# Altium PCB ESC.PcbDoc (part 1 of 3)
Units mm, origin at the board's own origin, x right, y up, seen from the top; angles counter-clockwise.
Board outline 60 x 40 mm, 4 copper layers (L1-SIGNAL/PWR, L2-GND, L3-PWR, L4-SIGNAL/PWR), stack 1.571 mm thick; 124 components, 80 nets, 417 pads, 463 vias.
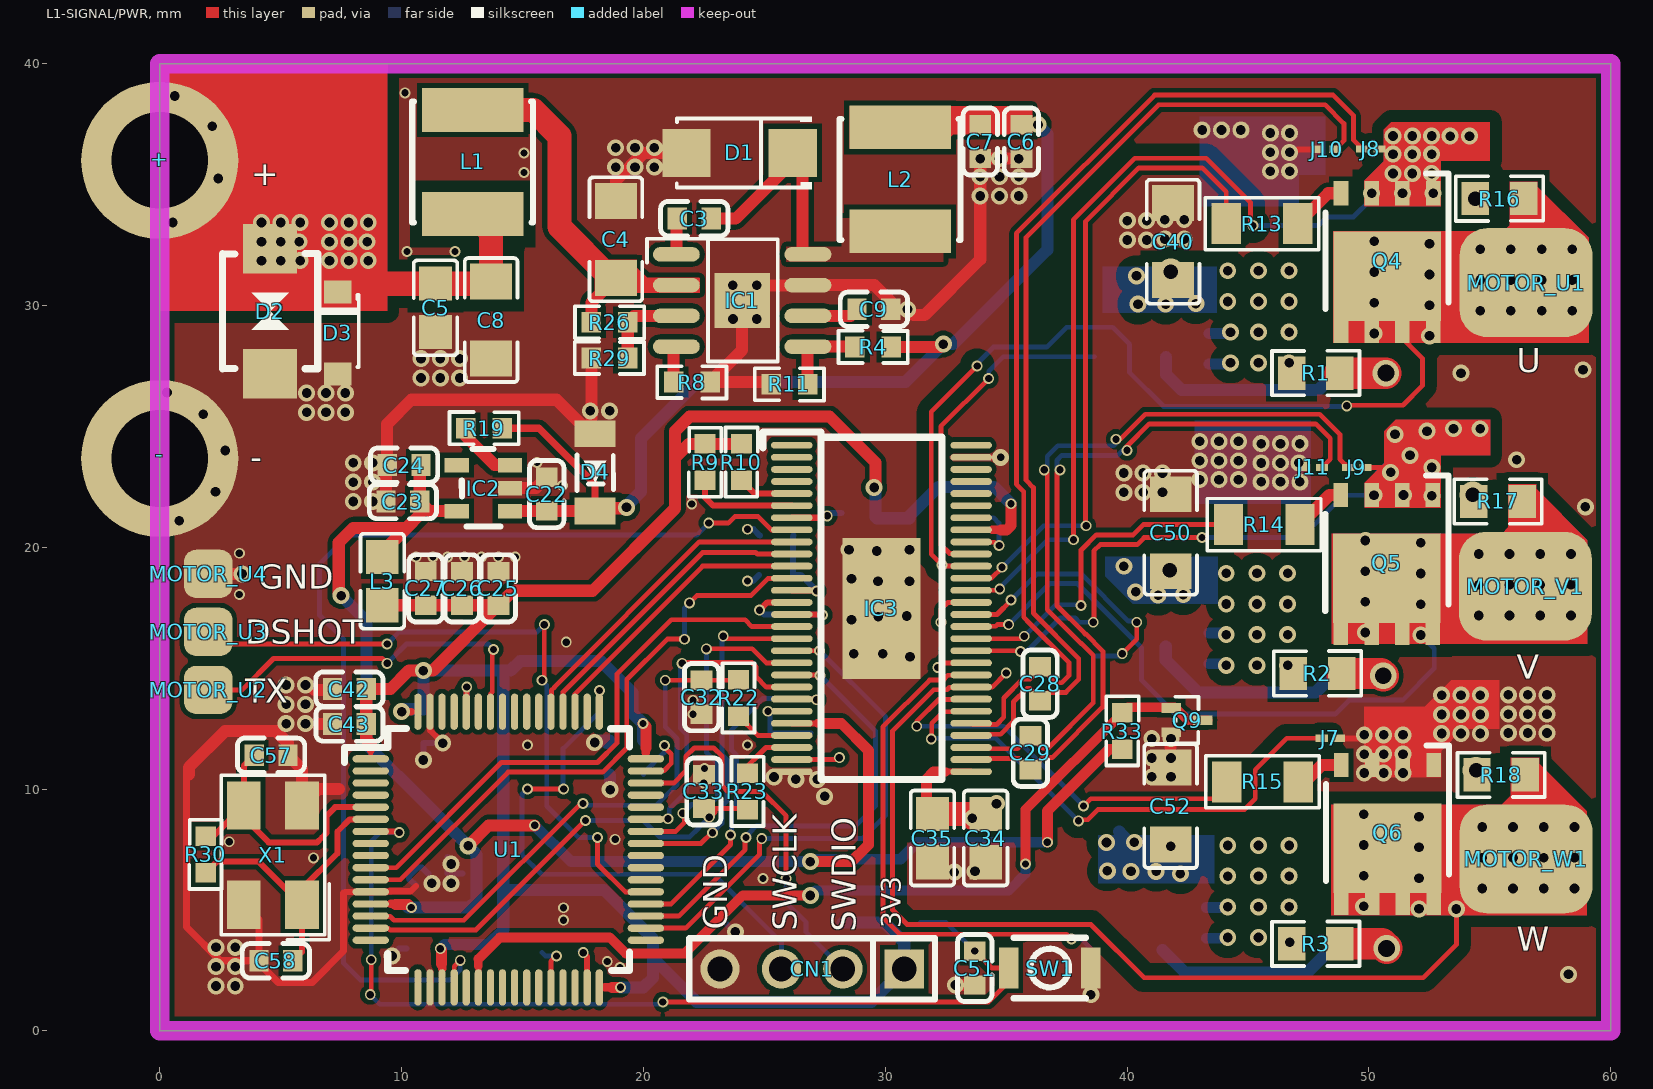
[diagram p0: L1-SIGNAL/PWR view]
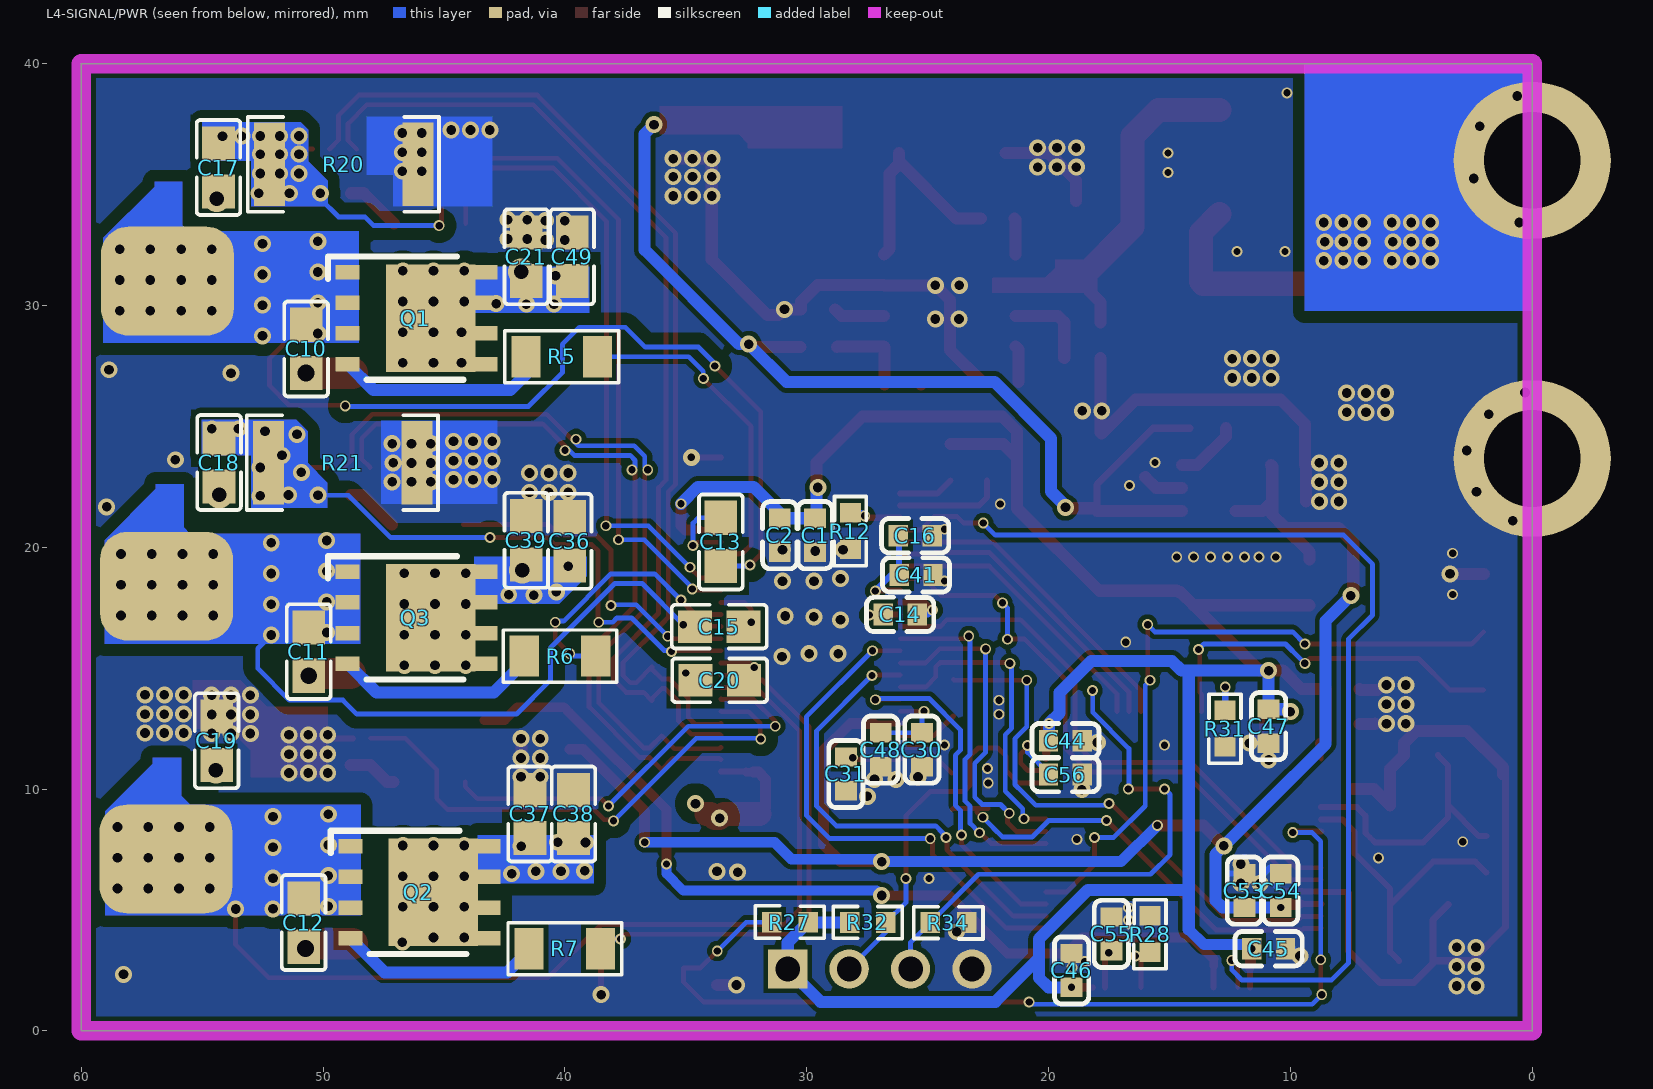
[diagram p1: L4-SIGNAL/PWR view, seen from below]
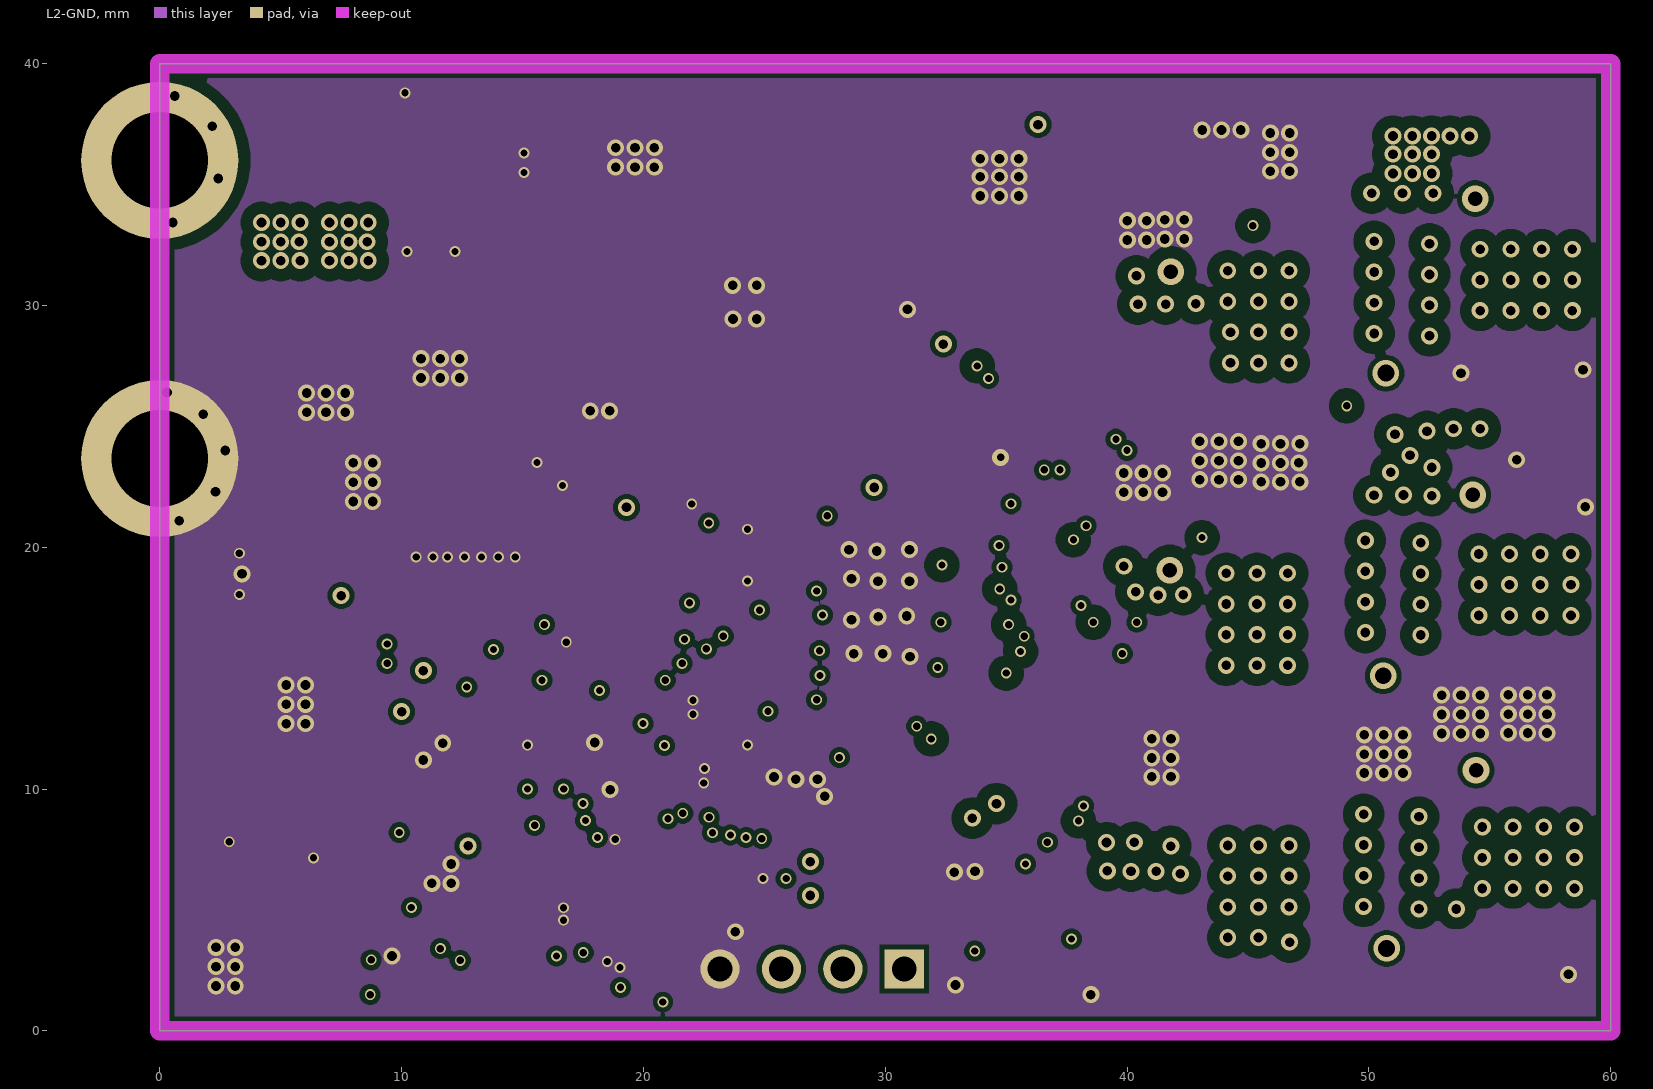
[diagram p2: L2-GND]
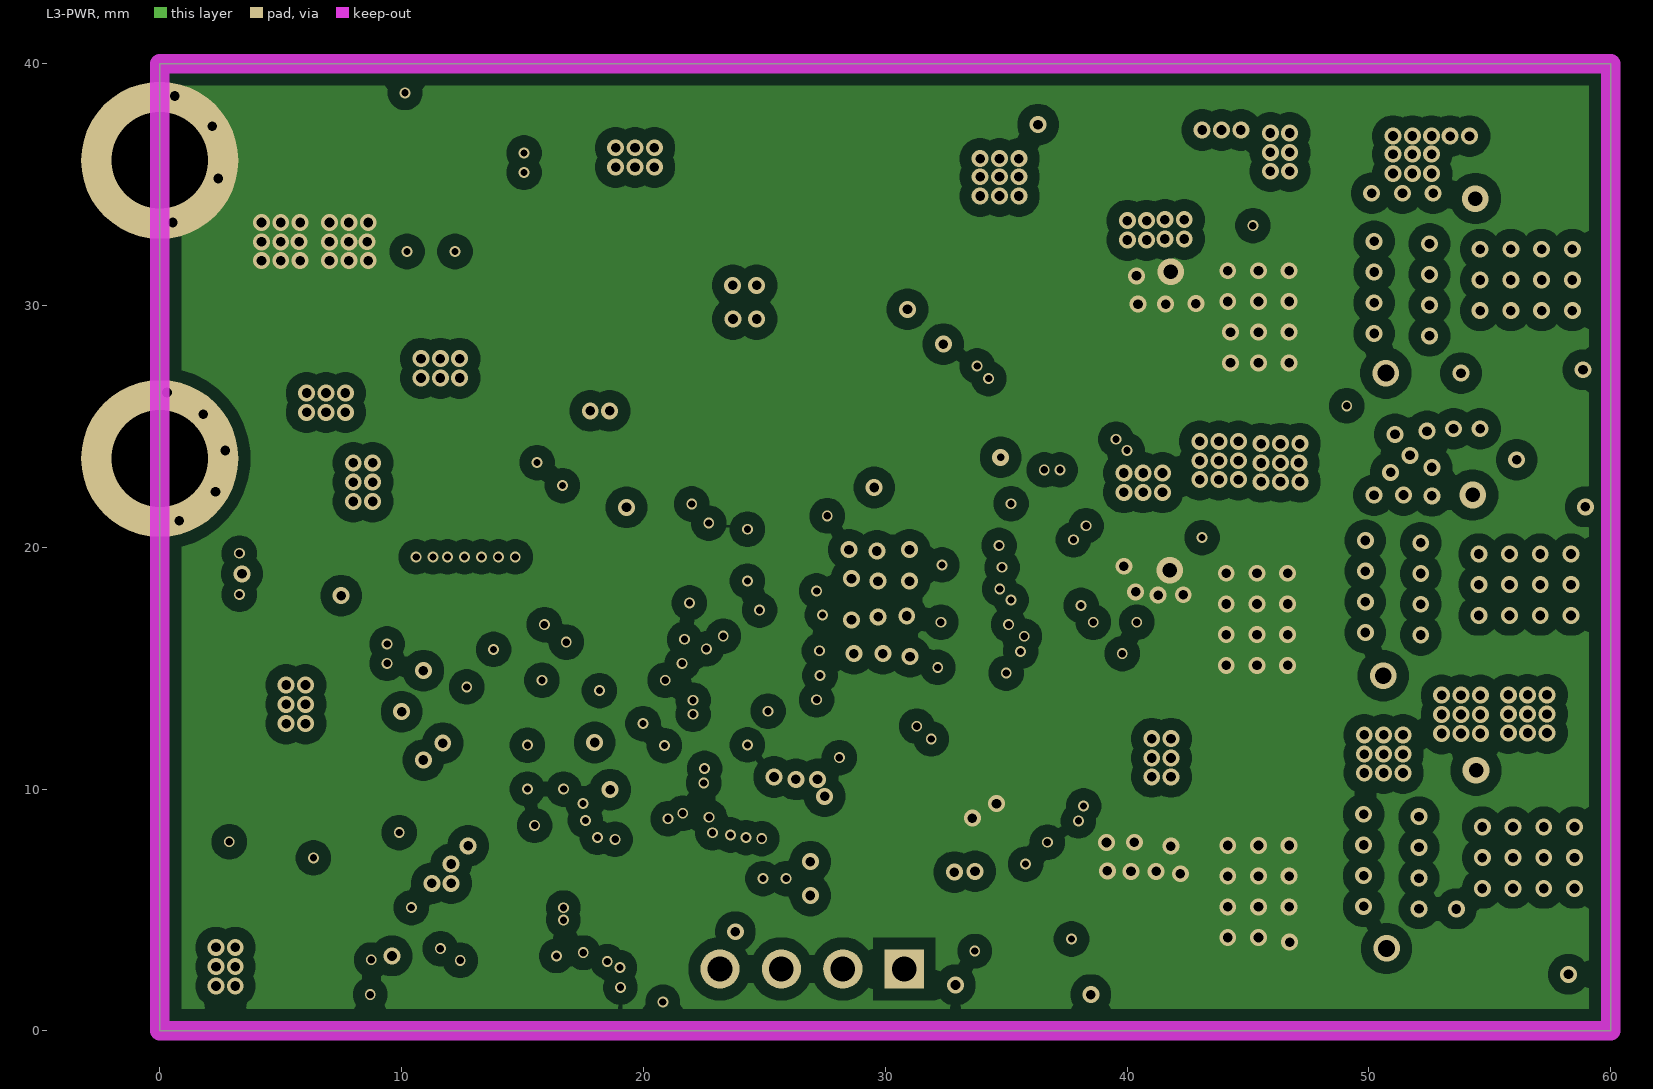
[diagram p3: L3-PWR]
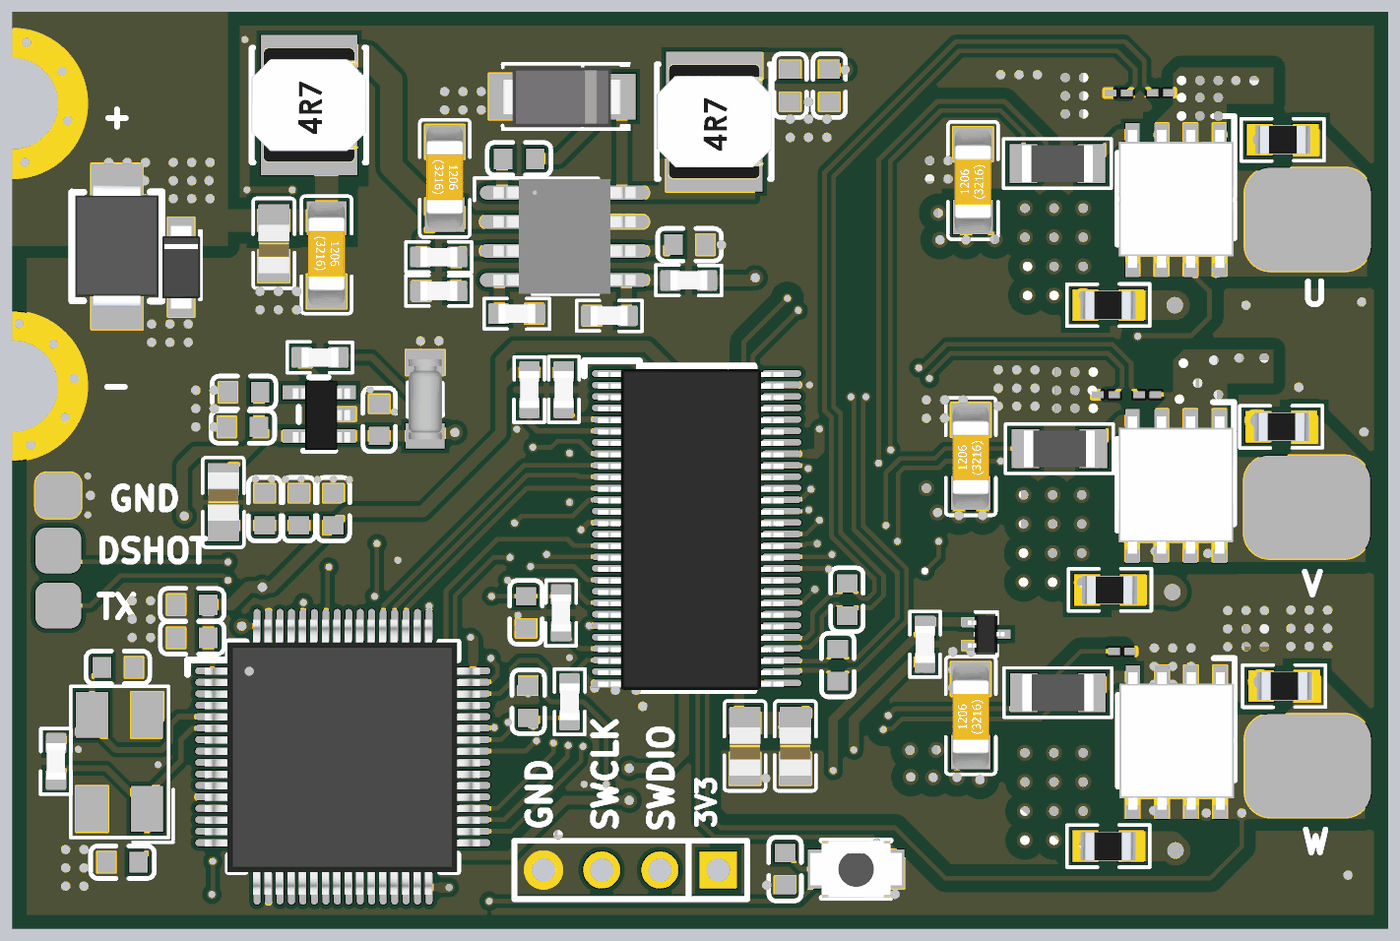
[diagram p5: 3D render of the assembled board from above, using the file's embedded part models]
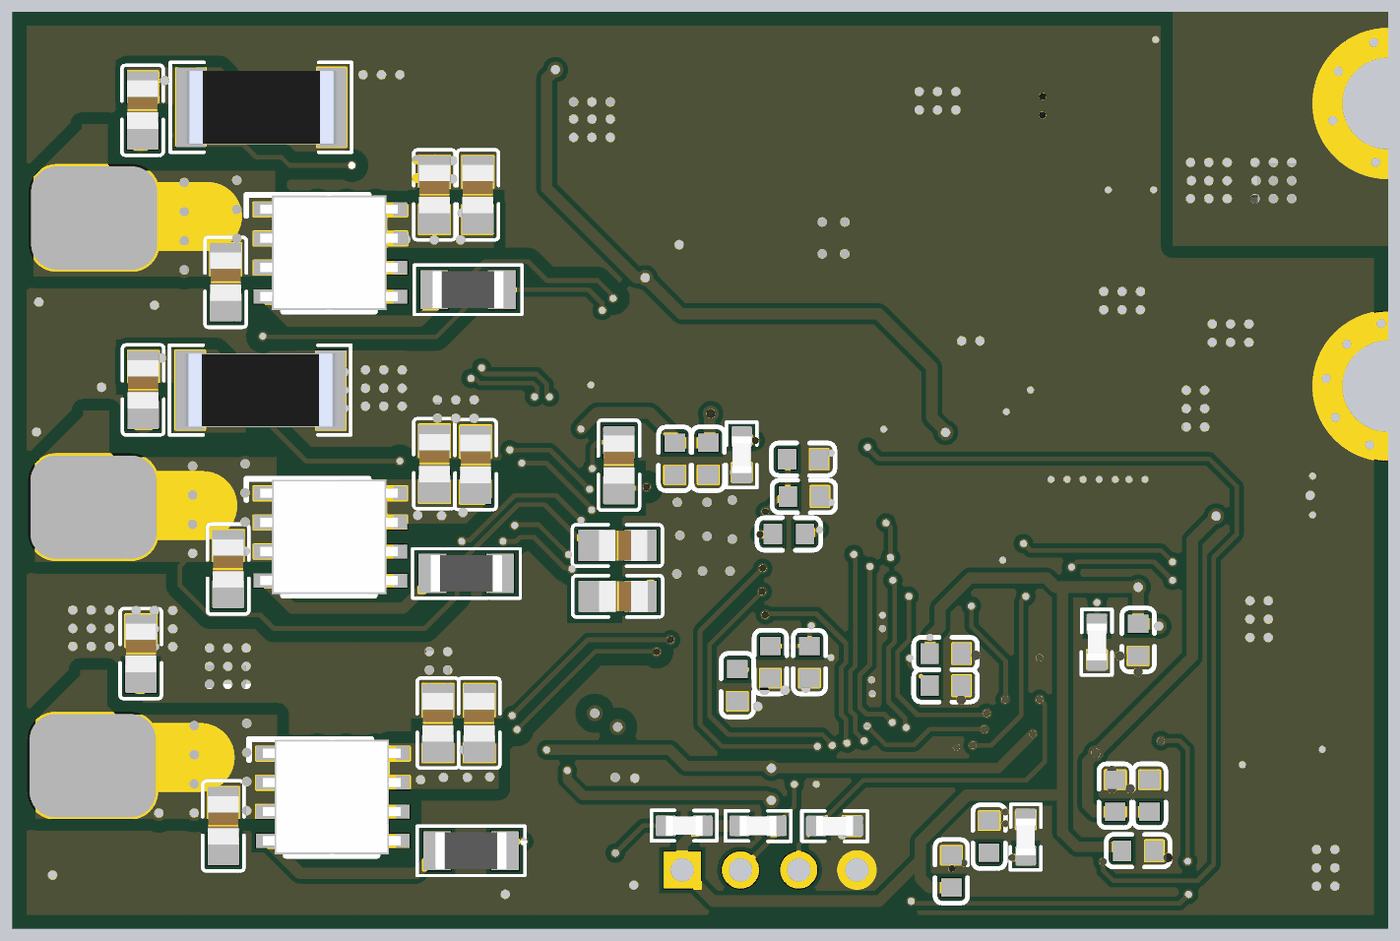
[diagram p6: 3D render of the assembled board from below, using the file's embedded part models]

## Layer stack, top to bottom
Top Solder: solder mask 0.0102, Solder Resist, Dk 3.5
L1-SIGNAL/PWR: signal copper 0.035
Dielectric 2: prepreg 0.107, 3313, Dk 4.5
Dielectric 4: prepreg 0.0935, 2116, Dk 4.1
L2-GND: signal copper 0.07
Dielectric 1: core 0.96, Core-042, Dk 4.6
L3-PWR: signal copper 0.07
Dielectric 3: prepreg 0.107, 3313, Dk 4.5
Dielectric 5: prepreg 0.0935, 2116, Dk 4.1
L4-SIGNAL/PWR: signal copper 0.035
Bottom Solder: solder mask 0.0102, Solder Resist, Dk 3.5

## Board outline
0,0 60,0 60,40 0,40

## Design rules (kind name [scope] priority, off if disabled: settings)
Clearance Clearance_POWER [InNetClass('POWER')] p1: gap=0.2 ignorepadtopadclearanceinfootprint=TRUE except(0.5: Arc-Fill Arc-Poly Arc-Region Track-Fill Track-Poly Track-Region SMDPad-Fill SMDPad-Poly SMDPad-Region THPad-Fill THPad-Poly THPad-Region Via-Fill Via-Poly Via-Region Fill-Fill Fill-Poly Fill-Region Poly-Poly Poly-Region Region-Region)
Clearance [All] p2: gap=0.2 ignorepadtopadclearanceinfootprint=TRUE
ComponentClearance Ignore_Top_Bottom_Collision [OnTop vs OnBottom] p1: gap=0.254 collisioncheckmode=3 verticalgap=-2 showdistances=FALSE
ComponentClearance [All] p2: gap=0.254 collisioncheckmode=3 verticalgap=0.254 showdistances=FALSE
DiffPairsRouting DiffPair_S2DiffPairsRouting [InDifferentialPair ('S2')] p1: maxlimit=0.4 minlimit=0.17 mostfreqgap=0.2 toplayer_minwidth=0.17 toplayer_maxwidth=0.2 toplayer_prefwidth=0.2 midlayer1_minwidth=0.17 midlayer1_maxwidth=0.2 midlayer1_prefwidth=0.2 midlayer2_minwidth=0.17 midlayer2_maxwidth=0.2 midlayer2_prefwidth=0.2 bottomlayer_minwidth=0.17 bottomlayer_maxwidth=0.2 bottomlayer_prefwidth=0.2 maxuncoupledlength=12.7
DiffPairsRouting DiffPair_S1DiffPairsRouting [InDifferentialPair ('S1')] p2: maxlimit=0.4 minlimit=0.17 mostfreqgap=0.2 toplayer_minwidth=0.17 toplayer_maxwidth=0.2 toplayer_prefwidth=0.2 midlayer1_minwidth=0.17 midlayer1_maxwidth=0.2 midlayer1_prefwidth=0.2 midlayer2_minwidth=0.17 midlayer2_maxwidth=0.2 midlayer2_prefwidth=0.2 bottomlayer_minwidth=0.17 bottomlayer_maxwidth=0.2 bottomlayer_prefwidth=0.2 maxuncoupledlength=12.7
DiffPairsRouting DiffPairsRouting_1 [InDifferentialPair ('S1')] p3: maxlimit=0.254 minlimit=0.254 mostfreqgap=0.254 toplayer_minwidth=0.381 toplayer_maxwidth=0.381 toplayer_prefwidth=0.381 midlayer1_minwidth=0.381 midlayer1_maxwidth=0.381 midlayer1_prefwidth=0.381 midlayer2_minwidth=0.381 midlayer2_maxwidth=0.381 midlayer2_prefwidth=0.381 bottomlayer_minwidth=0.381 bottomlayer_maxwidth=0.381 bottomlayer_prefwidth=0.381 maxuncoupledlength=12.7
DiffPairsRouting DiffPair_DIFFDiffPairsRouting [InDifferentialPair ('CAN')] p4: maxlimit=0.4 minlimit=0.3 mostfreqgap=0.3 toplayer_minwidth=0.2 toplayer_maxwidth=0.4 toplayer_prefwidth=0.2 midlayer1_minwidth=0.2 midlayer1_maxwidth=0.4 midlayer1_prefwidth=0.2 midlayer2_minwidth=0.2 midlayer2_maxwidth=0.4 midlayer2_prefwidth=0.2 bottomlayer_minwidth=0.2 bottomlayer_maxwidth=0.4 bottomlayer_prefwidth=0.2 maxuncoupledlength=12.7
DiffPairsRouting [All] p5: maxlimit=0.254 minlimit=0.254 mostfreqgap=0.254 toplayer_minwidth=0.381 toplayer_maxwidth=0.381 toplayer_prefwidth=0.381 midlayer1_minwidth=0.381 midlayer1_maxwidth=0.381 midlayer1_prefwidth=0.381 midlayer2_minwidth=0.381 midlayer2_maxwidth=0.381 midlayer2_prefwidth=0.381 bottomlayer_minwidth=0.381 bottomlayer_maxwidth=0.381 bottomlayer_prefwidth=0.381 maxuncoupledlength=12.7
HoleSize [All] p1: absolutevalues=TRUE maxlimit=5 minlimit=0.025 maxpercent=80.000 minpercent=20.000
HoleToHoleClearance [All] p1: gap=0.2 allowstackedmicrovias=TRUE
MatchedLengths DiffPair_S2MatchedLengths [InDifferentialPair ('S2')] p1: tolerance=10 checknetsindiffpair=TRUE checkdiffpairvsdiffpair=FALSE checkxsignals=FALSE checkothers=FALSE
MatchedLengths DiffPair_S1MatchedLengths [InDifferentialPair ('S1')] p2: tolerance=10 checknetsindiffpair=TRUE checkdiffpairvsdiffpair=FALSE checkxsignals=FALSE checkothers=FALSE
MatchedLengths [InDifferentialPair ('S1')] p3: tolerance=25.4 checknetsindiffpair=FALSE checkdiffpairvsdiffpair=TRUE checkxsignals=TRUE checkothers=TRUE
MatchedLengths DiffPair_DIFFMatchedLengths [InDifferentialPair ('CAN')] p4: tolerance=5 checknetsindiffpair=TRUE checkdiffpairvsdiffpair=FALSE checkxsignals=FALSE checkothers=FALSE
MinimumSolderMaskSliver [All] p1: minsoldermaskwidth=0.1
PlaneConnect [All] p1: pad.planeconnectstyle=Relief pad.reliefexpansion=1 pad.reliefentries=4 pad.reliefconductorwidth=1 pad.reliefairgap=1 via.planeconnectstyle=Direct via.reliefexpansion=1 via.reliefentries=4 via.reliefconductorwidth=1 via.reliefairgap=1
PolygonConnect [All] p1: connectstyle=Direct reliefconductorwidth=0.254 reliefentries=4 polygonreliefangle="90 Angle" airgapwidth=0.254
RoutingVias [All] p1: holewidth=0.4 width=0.7 viastyle="Through Hole" minholewidth=0.2 minwidth=0.4 maxholewidth=0.7 maxwidth=1.1
SilkToSilkClearance [All] p1: silktosilkclearance=0
SilkToSolderMaskClearance [IsPad] p1: minsilkscreentomaskgap=0.1 clearancetoexposedcopper=TRUE
SolderMaskExpansion [All] p1: expansion=0.102 istentingtop=FALSE
SupplyNets "Schematic Supply Nets" [InNet('GND')] p1: voltage=0.000
SupplyNets "Schematic Supply Nets_6" [InNet('V_5V')] p2: voltage=0.000
SupplyNets "Schematic Supply Nets_5" [InNet('VDD_SPI')] p3: voltage=0.000
SupplyNets "Schematic Supply Nets_4" [InNet('POWER_BUCK')] p4: voltage=0.000
SupplyNets "Schematic Supply Nets_3" [InNet('POWER_IN')] p5: voltage=0.000
SupplyNets "Schematic Supply Nets_1" [InNet('A3V3')] p6: voltage=0.000
UnRoutedNet [All] p1: checkbadconnections=TRUE
Width Width_ [All] p1: maxlimit=14 minlimit=0.17 preferedwidth=0.254
Width Width_power [InNetClass('PWR')] p2: maxlimit=14 minlimit=0.2 preferedwidth=5
Width Width_signal [All] p3: maxlimit=1.5 minlimit=0.17 preferedwidth=0.3 midlayer2_maxwidth=0.5 minimp=50.000000 maximp=50.000000 favimp=50.000000
21 further rules are at their usual default settings.

## Classes and differential pairs
net class POWER: POWER_IN SH_A SH_B SH_C SL_A SL_B SL_C
net class PWR: A3V3 GND POWER_BUCK V_5V VDD_SPI
differential pair class DIFF: CAN S1 S2
net class TIME1: AH AL BH BL CH CL EN_GATE
net class SPI3: GND NetIC3_7 nSCS SCLK SDI SDO
net class CSAI: S1_N S1_P S2_N S2_P
differential pair S2: +S2_P -S2_N
differential pair S1: +S1_P -S1_N

## Components (designator, comment, footprint, x,y, rotation, side; value= is the part's Value field where it differs from the comment)
+ "PAD" PAD#1 5,32.8 r0 top (schematic designator J1)
- "PAD" PAD#2 4.78,23.67 r0 top (schematic designator J2)
C1 "100nF" C0603 29.653,20.5 r90 bottom
C2 "10uF" C0603 31.112,20.499 r90 bottom
C3 "100nF" C0603 22.1,33.59 r180 top
C4 "10uF" C1206 18.86,32.731 r90 top
C5 "100nF" C0805#1 11.4,29.9 r90 top
C6 "47uF" C0603 35.627,36.777 r90 top
C7 "47uF" C0603 33.927,36.777 r90 top
C8 "10uF" C1206 13.7,29.395 r90 top
C9 "15nF" C0603 29.53,29.84 r180 top
C10 "470PF" C0805#2 50.7,28.2 r270 bottom
C11 "470PF" C0805#2 50.591,15.685 r270 bottom
C12 "470PF" C0805#2 50.8,4.48 r270 bottom
C13 "100nF" C0805#2 33.549,20.22 r270 bottom
C14 "220nF" C0603 26.134,17.22 r180 bottom
C15 "100nF" C0805#2 33.614,16.72 r0 bottom
C16 "2.2uF" C0603 25.513,20.48 r0 bottom
C17 "470PF" C0805#2 54.322,35.703 r270 bottom
C18 "470PF" C0805#2 54.3,23.504 r270 bottom
C19 "470PF" C0805#2 54.4,12 r270 bottom
C20 "100nF" C0805#2 33.6,14.5 r0 bottom
C21 "100nF" C0805#2 41.596,32.016 r270 bottom
C22 "10uF" C0603 16,22.2 r270 top
C23 "10uF" C0603 10.05,21.89 r0 top
C24 "100nF" C0603 10.1,23.4 r0 top
C25 "10uF" C0603 14,18.3 r270 top
C26 "1uF" C0603 12.5,18.3 r270 top
C27 "100nF" C0603 11,18.3 r270 top
C28 "1nF" C0603 36.4,14.355 r90 top
C29 "1nF" C0603 36,11.5 r90 top
C30 "1uF" C0603 25.237,11.63 r90 bottom
C31 "1uF" C0603 28.38,10.624 r270 bottom
C32 "2.2uF" C0603 22.4,13.8 r90 top
C33 "2.2uF" C0603 22.5,9.9 r270 top
C34 "100nF" C0805#1 34.15,7.975 r90 top
C35 "4.7uF" C0805#1 31.95,7.975 r90 top
C36 "100nF" C0805#2 39.8,20.244 r270 bottom
C37 "100nF" C0805#2 41.442,8.97 r270 bottom
C38 "1uF" C0805#2 39.642,8.97 r270 bottom
C39 "1uF" C0805#2 41.596,20.285 r270 bottom
C40 "10uF" C1206 41.9,32.638 r270 top
C41 "100nF" C0603 25.48,18.857 r0 bottom
C42 "10uF" C0603 7.838,14.134 r0 top
C43 "1uF" C0603 7.841,12.689 r0 top
C44 "100nF" C0603 19.3,12 r0 bottom
C45 "100nF" C0603 10.9,3.4 r0 bottom
C46 "100nF" C0603 19.048,2.5 r270 bottom
C47 "100nF" C0603 10.9,12.6 r90 bottom
C48 "100nF" C0603 26.939,11.63 r90 bottom
C49 "1uF" C0805#2 39.7,32.016 r270 bottom
C50 "10uF" C1206 41.8,20.6 r270 top
C51 "100nF" C0603 33.7,2.6 r270 top
C52 "10uF" C1206 41.8,9.3 r270 top
C53 "1uF" C0603 11.9,5.8 r270 bottom
C54 "100nF" C0603 10.4,5.8 r270 bottom
C55 "2.2uF" C0603 17.4,4.013 r270 bottom
C56 "2.2uF" C0603 19.3,10.6 r0 bottom
C57 "18pF" C0603 4.6,11.4 r180 top
C58 "18pF" C0603 4.8,2.9 r180 top
CN1 "4PIN" HDR-TH_4P-HX-PH254-01-04-Z-L11.5 26.974,2.561 r180 top
D1 "DIODE SCHOTTKY 100V SMA(DO-214AC)" SMA_L4.3-W2.6-LS5.2-RD 23.98,36.305 r180 top
D2 "TVS DIODE 54VWM 87.1VC DO-214AB(SMCJ)" SMB_L4.6-W3.6-LS5.3-BI 4.56,29.761 r90 top
D3 "DIODE ZENER 56V 500mW SOD-123W" SOD-123_L2.8-W1.8-LS3.7-RD 7.36,28.86 r270 top
D4 "DIODE ZENER 5.6V 500mW LL-34" LL-34_L3.5-W1.5-RD 18,23.1 r90 top
IC1 "60V 3A Step-Down Converter" SOIC-8_L4.9-W3.9-P1.27-LS6.0-BL-EP2.3 24.08,30.205 r270 top
IC2 "500mA Low-Noise LDo Voltage Regulator" SOT-23-5_L2.9-W1.6-P0.95-LS2.8-BR 13.376,22.448 r90 top
IC3 "DRV8301 Three-Phase Gate Driver With Dual Current Shunt Amplifiers and Buck Regulator" HTSSOP-56_L14.0-W6.0-P0.50-LS8.1-BL-EP 29.842,17.47 r270 top
J7 "2 way net tie junction" 2way_LP 48.4,12.1 r0 top net-tie
J8 "2 way net tie junction" 2way_LP 50.084,36.47 r0 top net-tie
J9 "2 way net tie junction" 2way_LP 49.5,23.3 r0 top net-tie
J10 "2 way net tie junction" 2way_LP 48.249,36.455 r180 top net-tie
J11 "2 way net tie junction" 2way_LP 47.7,23.3 r180 top net-tie
L1 "47uH" IND-SMD_L5.0-W5.0_FNR50XXS 12.936,35.931 r90 top
L2 "47uH" IND-SMD_L5.0-W5.0_FNR50XXS 30.61,35.21 r90 top
L3 "220Ω" C0805#1 9.2,18.6 r270 top
MOTOR_U1 "PAD" PAD#3 56.5,30.942 r90 top
MOTOR_U2 "PAD" PAD#4 2,14.1 r270 top
MOTOR_U3 "PAD" PAD#4 2,16.5 r270 top
MOTOR_U4 "PAD" PAD#4 2,18.9 r270 top
MOTOR_V1 "PAD" PAD#3 56.468,18.391 r90 top
MOTOR_W1 "PAD" PAD#3 56.499,7.11 r90 top
Q1 "MOSFET N-CH 80V 100A SOP-8-Advance" SOP-8_L5.0-W5.0-P1.27-LS6.0_TPH4R008NH-L1Q#1 46.183,29.476 r270 bottom
Q2 "MOSFET N-CH 80V 100A SOP-8-Advance" SOP-8_L5.0-W5.0-P1.27-LS6.0_TPH4R008NH-L1Q#1 46.07,5.735 r270 bottom
Q3 "MOSFET N-CH 80V 100A SOP-8-Advance" SOP-8_L5.0-W5.0-P1.27-LS6.0_TPH4R008NH-L1Q#1 46.184,17.086 r270 bottom
Q4 "MOSFET N-CH 80V 100A SOP-8-Advance" SOP-8_L5.0-W5.0-P1.27-LS6.0_TPH4R008NH-L1Q#2 50.749,31.838 r180 top
Q5 "MOSFET N-CH 80V 100A SOP-8-Advance" SOP-8_L5.0-W5.0-P1.27-LS6.0_TPH4R008NH-L1Q#2 50.743,19.36 r180 top
Q6 "MOSFET N-CH 80V 100A SOP-8-Advance" SOP-8_L5.0-W5.0-P1.27-LS6.0_TPH4R008NH-L1Q#2 50.769,8.19 r180 top
Q9 "TRANS NPN 40V 200mA SOT-416" SC-75-3_L1.6-W0.8-P1.00-LS1.6-BR 42.476,12.85 r270 top
R1 "10Ω" R0805 47.8,27.2 r180 top
R2 "10Ω" R0805 47.87,14.78 r180 top
R3 "10Ω" R0805 47.8,3.6 r180 top
R4 "100KΩ" R0603#1 29.5,28.28 r0 top
R5 "8.06Ω" R1206 40.13,27.876 r0 bottom
R6 "8.06Ω" R1206 40.2,15.5 r0 bottom
R7 "8.06Ω" R1206 40,3.4 r0 bottom
R8 "49.9kΩ" R0603#1 22,26.83 r180 top
R9 "10kΩ" R0603#1 22.549,23.52 r90 top
R10 "10kΩ" R0603#1 24.049,23.52 r270 top
R11 "17.8kΩ" R0603#1 26.03,26.74 r180 top
R12 "24.9KΩ" R0603#2 28.192,20.672 r90 bottom
R13 "8.06Ω" R1206 45.579,33.381 r0 top
R14 "8.06Ω" R1206 45.668,20.938 r0 top
R15 "8.06Ω" R1206 45.6,10.3 r0 top
R16 "10Ω" R0805 55.401,34.419 r0 top
R17 "10Ω" R0805 55.341,21.895 r0 top
R18 "10Ω" R0805 55.467,10.589 r0 top
R19 "10kΩ" R0603#1 13.41,24.92 r0 top
R20 "3.3mΩ" R2512 49.14,35.834 r0 bottom
R21 "3.3mΩ" R2512 49.181,23.5 r0 bottom
R22 "56Ω" R0603#1 23.931,13.774 r90 top
R23 "56Ω" R0603#1 24.3,9.9 r270 top
R26 "100KΩ" R0603#1 18.596,29.305 r180 top
R27 "10kΩ" R0603#2 30.699,4.493 r180 bottom
R28 "10kΩ" R0603#2 15.8,4 r90 bottom
R29 "12kΩ" R0603#1 18.596,27.825 r0 top
R30 "1MΩ" R0603#1 1.9,7.3 r90 top
R31 "10kΩ" R0603#2 12.7,12.5 r90 bottom
R32 "10kΩ" R0603#2 27.476,4.486 r0 bottom
R33 "33kΩ" R0603#1 39.8,12.4 r270 top
R34 "10kΩ" R0603#2 24.14,4.479 r0 bottom
SW1 "B3U-1000P" KEY-SMD_B3U-1000PM 36.8,2.6 r0 top
U1 "ARM Cortex-M4 32b MCU+FPU, 210DMIPS, up to 1MB Flash/192+4KB RAM, USB OTG HS/FS, Ethernet, 17 TIMs, 3 ADCs, 15 comm. interfaces & camera" LQFP-64_L10.0-W10.0-P0.50-LS12.0-BL 14.4,7.5 r270 top
X1 "8MHz" OSC-SMD_4P-L5.0-W3.2-BL 4.672,7.274 r90 top

## Footprints (in the part's own frame and the unit in brackets; to place one, negate y for a bottom-side part, rotate by r counter-clockwise, add the part's x,y. Pads: shape width x height; smd on the part's side, far side on the other; paste and mask are expansions set on the pad)
2way_LP [mil] "2 way low power net tie junction"
  rrect5% 20x12 smd paste+0: 1(-14,0) 2(14,0)
C0603 [mm] "cap 0603"
  rect 0.8x0.9 smd paste+0 mask+0.051: 1(-0.7,0) 2(0.7,0)
  silkscreen extent -1.39,-0.71 1.39,0.71, body extent -0.81,-0.4 0.79,0.4, height 0.8
C0805#1 [mm]
  rect 1.41x1.35 smd paste+0 mask+0.05: 1(-1,0)
  rect 1.41x1.35 smd paste+0 mask+0.051: 2(1,0)
  silkscreen extent -1.96,-0.9 1.96,0.9, body extent -1.3,-0.67 0.8,0.67, height 0.71
C0805#2 [mm]
  rect 1.41x1.35 smd paste+0 mask+0.051: 1(-1,0) 2(1,0)
  silkscreen extent -1.96,-0.9 1.96,0.9, body extent -1.3,-0.67 0.8,0.67, height 0.71
C1206 [mm] "1206"
  rect 1.485x1.728 smd paste+0 mask+0.051: 1(-1.593,0) 2(1.593,0)
  silkscreen extent -2.56,-1.09 2.56,1.09, body extent -2.22,-0.8 2.32,0.8, height 1.25
HDR-TH_4P-HX-PH254-01-04-Z-L11.5 [mm] "Through Hole,P=2.54mm"
  rect 1.62x1.62 hole 1.02 paste-2539.97 mask+0.051: 1(-3.81,0)
  round 1.62 hole 1.02 paste-2539.97 mask+0.051: 2(-1.27,0) 3(1.27,0) 4(3.81,0)
  silkscreen extent -5.08,-1.27 5.08,1.27
HTSSOP-56_L14.0-W6.0-P0.50-LS8.1-BL-EP [mm] "HTSSOP-56-EP-6mm"
  oval 0.28x1.715 smd paste+0 mask+0.05: 1(-6.75,-3.708) 2(-6.25,-3.708) 3(-5.75,-3.708) 4(-5.25,-3.708) 5(-4.75,-3.708) 6(-4.25,-3.708) 7(-3.75,-3.708) 8(-3.25,-3.708) 9(-2.75,-3.708) 10(-2.25,-3.708) 11(-1.75,-3.708) 12(-1.25,-3.708) 13(-0.75,-3.708) 14(-0.25,-3.708) 15(0.25,-3.708) 16(0.75,-3.708) 17(1.25,-3.708) 18(1.75,-3.708) 19(2.25,-3.708) 20(2.75,-3.708) 21(3.25,-3.708) 22(3.75,-3.708) 23(4.25,-3.708) 24(4.75,-3.708) 25(5.25,-3.708) 26(5.75,-3.708) 27(6.25,-3.708) 28(6.75,-3.708) 29(6.75,3.708) 30(6.25,3.708) 31(5.75,3.708) 32(5.25,3.708) 33(4.75,3.708) 34(4.25,3.708) 35(3.75,3.708) 36(3.25,3.708) 37(2.75,3.708) 38(2.25,3.708) 39(1.75,3.708) 40(1.25,3.708) 41(0.75,3.708) 42(0.25,3.708) 43(-0.25,3.708) 44(-0.75,3.708) 45(-1.25,3.708) 46(-1.75,3.708) 47(-2.25,3.708) 48(-2.75,3.708) 49(-3.25,3.708) 50(-3.75,3.708) 51(-4.25,3.708) 52(-4.75,3.708) 53(-5.25,3.708) 54(-5.75,3.708) 55(-6.25,3.708) 56(-6.75,3.708)
  rect 5.825x3.235 smd paste+0 mask+0.051: 57(0,0)
  silkscreen extent -7.3,-4.9 7.08,2.5, body extent -6.95,-4.3 7.05,3.8, height 1.13
IND-SMD_L5.0-W5.0_FNR50XXS [mm] "SMD,5x5mm"
  rect 1.8x4.2 smd paste+0 mask+0.051: 1(-2.15,0) 2(2.15,0)
  silkscreen extent -2.5,-2.5 2.5,2.5, body extent -2.5,-2.5 2.5,2.5, height 4
KEY-SMD_B3U-1000PM [mm]
  rect 0.8x1.7 smd paste+0 mask+0.051: 1(-1.7,0) 2(1.7,0)
  silkscreen extent -1.5,-1.25 1.5,1.25, body extent -2,-1.25 2,1.25, height 1.75
LL-34_L3.5-W1.5-RD [mm]
  rect 1.1x1.7 smd paste+0 mask+0.051: 1(-1.6,0) 2(1.6,0)
  silkscreen extent -0.75,-0.76 0.72,0.75, body extent -1.75,-0.75 1.75,0.72, height 1.52
LQFP-64_L10.0-W10.0-P0.50-LS12.0-BL [mm] "LQFP-64(10x10)"
  oval 0.3x1.5 smd paste+0 mask+0.049: 1(-3.75,-5.678) 2(-3.25,-5.678) 3(-2.75,-5.678) 4(-2.25,-5.678) 5(-1.75,-5.678) 6(-1.25,-5.678) 7(-0.75,-5.678) 8(-0.25,-5.678) 9(0.25,-5.678) 10(0.75,-5.678) 11(1.25,-5.678) 12(1.75,-5.678) 13(2.25,-5.678) 14(2.75,-5.678) 15(3.25,-5.678) 16(3.75,-5.678) 33(3.75,5.698) 34(3.25,5.698) 35(2.75,5.698) 36(2.25,5.698) 37(1.75,5.698) 38(1.25,5.698) 39(0.75,5.698) 40(0.25,5.698) 41(-0.25,5.698) 42(-0.75,5.698) 43(-1.25,5.698) 44(-1.75,5.698) 45(-2.25,5.698) 46(-2.75,5.698) 47(-3.25,5.698)
  oval 1.5x0.3 smd paste+0 mask+0.049: 17(5.7,-3.728) 18(5.7,-3.228) 19(5.7,-2.728) 20(5.7,-2.228) 21(5.7,-1.728) 22(5.7,-1.228) 23(5.7,-0.728) 24(5.7,-0.228) 25(5.7,0.272) 26(5.7,0.772) 27(5.7,1.272) 28(5.7,1.772) 29(5.7,2.272) 30(5.7,2.772) 31(5.7,3.272) 50(-5.7,3.272) 51(-5.7,2.772) 52(-5.7,2.272) 53(-5.7,1.772) 54(-5.7,1.272) 55(-5.7,0.772) 56(-5.7,0.272) 57(-5.7,-0.228) 58(-5.7,-0.728) 59(-5.7,-1.228) 60(-5.7,-1.728) 61(-5.7,-2.228) 62(-5.7,-2.728) 63(-5.7,-3.228)
  oval 1.5x0.3 smd paste+0 mask+0.05: 32(5.7,3.772) 49(-5.7,3.772) 64(-5.7,-3.728)
  oval 0.3x1.5 smd paste+0 mask+0.05: 48(-3.75,5.698)
  silkscreen extent -5.01,-6.76 5,5.03, body extent -5.98,-6.01 6.02,5.99, height 1.6
OSC-SMD_4P-L5.0-W3.2-BL [mm]
  rect 2x1.4 smd paste+0 mask+0.05: 1(-2.05,-1.2) 2(2.05,-1.2) 3(2.05,1.2) 4(-2.05,1.2)
  silkscreen extent -3.5,-2.34 3.3,2.13, body extent -2.63,-1.68 2.47,1.62, height 1.1
PAD#1 [mm]
  round 6.5 hole 4 mask+0.05: 1(-5,3.2)
PAD#2 [mm]
  round 6.5 hole 4 mask+0.05: 1(-4.78,0)
PAD#3 [mm]
  rrect50% 4.5x5.5 smd mask+0.05: 1(0,0)
PAD#4 [mm]
  rrect50% 2x2 smd mask+0.05: 1(0,0)
R0603#1 [mm] "Resister pakage 0603"
  rect 0.806x0.864 smd paste+0 mask+0.05: 1(-0.753,0) 2(0.753,0)
  silkscreen extent -1.43,-0.66 1.43,0.68, body extent -0.8,-0.43 0.8,0.43, height 0.48
R0603#2 [mm] "Resister pakage 0603"
  rect 0.806x0.864 smd paste+0 mask+0.051: 1(-0.753,0) 2(0.753,0)
  silkscreen extent -1.43,-0.66 1.43,0.68, body extent -0.8,-0.43 0.8,0.43, height 0.48
R0805 [mm] "0805"
  rect 1.133x1.377 smd paste-100 mask+0.051: 1(-1,0) 2(1,0)
  silkscreen extent -1.81,-0.93 1.81,0.92, body extent -1.19,-0.62 1.21,0.63, height 0.55
R1206 [mm] "package 1206"
  rect 1.208x1.701 smd paste+0 mask+0.051: 1(-1.479,0) 2(1.479,0)
  silkscreen extent -2.35,-1.08 2.35,1.08, body extent -1.55,-0.8 1.55,0.8, height 0.65
R2512 [mm] "R2512"
  rect 1.283x3.456 smd paste+0 mask+0.051: 1(-3.066,0) 2(3.066,0)
  silkscreen extent -3.94,-1.96 3.97,1.96, body extent -3.35,-1.6 3.35,1.6, height 0.55
SC-75-3_L1.6-W0.8-P1.00-LS1.6-BR [mm] "SOT-416"
  rect 0.4x0.816 smd paste+0 mask+0.05: 1(-0.5,-0.65) 2(0.5,-0.65) 3(0,0.65)
  silkscreen extent -0.97,-0.48 0.96,0.48, body extent -0.8,-0.8 0.8,0.8, height 0.78
SMA_L4.3-W2.6-LS5.2-RD [mm]
  rect 2x2 smd paste+0 mask+0.051: 1(-2.2,0) 2(2.2,0)
  silkscreen extent -2.98,-1.5 2.6,1.5, body extent -2.58,-1.28 2.62,1.32, height 2.45
SMB_L4.6-W3.6-LS5.3-BI [mm] "TVS DIODE 5VWM 9.2VC DO-214AA"
  rect 2.047x2.241 smd paste+0 mask+0.051: 1(-2.591,0) 2(2.591,0)
  silkscreen extent -2.38,-1.97 2.38,1.97, body extent -2.64,-1.81 2.7,1.82, height 2.65
SOD-123_L2.8-W1.8-LS3.7-RD [mm] "SOD-123"
  rect 0.95x1.15 smd paste+0 mask+0.051: 1(-1.693,0) 2(1.693,0)
  silkscreen extent -1.58,-0.87 1.41,0.87, body extent -1.8,-0.82 1.8,0.83, height 0.95
SOIC-8_L4.9-W3.9-P1.27-LS6.0-BL-EP2.3 [mm]
  oval 0.602x1.941 smd paste+0 mask+0.05: 1(-1.905,-2.72) 2(-0.635,-2.72) 3(0.635,-2.72) 4(1.905,-2.72) 5(1.905,2.72) 6(0.635,2.72) 7(-0.635,2.72) 8(-1.905,2.72)
  rect 2.29x2.29 smd paste+0 mask+0.05: 9(0,0)
  silkscreen extent -2.55,-3.93 2.53,1.47, body extent -2.5,-3.1 2.5,3.1, height 1.76
SOP-8_L5.0-W5.0-P1.27-LS6.0_TPH4R008NH-L1Q#1 [mm] "SOP-8-Advance"
  rect 0.6x1 smd paste+0 mask+0.051: 1(-1.905,-2.8) 2(-0.635,-2.8) 3(0.635,-2.8) 4(1.905,-2.8)
  rect 0.6x1.2 smd paste-100 mask+0.051: 5(1.905,2.8) 6(0.635,2.8) 7(-0.635,2.8) 8(-1.905,2.8)
  rect 4.45x3.7 smd paste+0 mask+0.051: 9(0,0.635)
  silkscreen extent -2.54,-3.61 2.55,1.99, body extent -2.66,-3 2.64,3, height 0.95
SOP-8_L5.0-W5.0-P1.27-LS6.0_TPH4R008NH-L1Q#2 [mm] "SOP-8-Advance"
  rect 0.6x1 smd paste+0 mask+0.05: 1(-1.905,-2.8) 2(-0.635,-2.8) 3(0.635,-2.8) 4(1.905,-2.8)
  rect 0.6x1.2 smd paste-100 mask+0.051: 5(1.905,2.8) 6(0.635,2.8) 7(-0.635,2.8) 8(-1.905,2.8)
  rect 4.45x3.7 smd paste+0 mask+0.05: 9(0,0.635)
  silkscreen extent -2.54,-3.61 2.55,1.99, body extent -2.66,-3 2.64,3, height 0.95
SOT-23-5_L2.9-W1.6-P0.95-LS2.8-BR [mm] "SOT-23-5"
  rect 0.6x1 smd paste+0 mask+0.05: 1(-0.95,-1.1) 2(0,-1.1) 3(0.95,-1.1) 4(0.95,1.1) 5(-0.95,1.1)
  silkscreen extent -1.6,-0.7 1.61,0.89, body extent -1.55,-1.35 1.45,1.15, height 1.1

## Part data
C1 C3 C24 C27 C41 C44 C45 C46 C47 C48 C51 C54: library part CC0603KRX7R9BB104, "100nF ±10% 50V Ceramic Capacitor X7R 0603"
  C1 C3 C24 C27 C44 C45 C46 C47 C51 C54: Simulation ModelName=C_Capacitor_Default, Simulation ModelText="C_Capacitor_Default 1 0 1p", Simulation PortMap=(1:1),(2:2)
C2 C22 C23 C25 C42: library part CL10A106KP8NNNC, "10uF ±10% 10V Ceramic Capacitor X5R 0603", Simulation ModelName=C_Capacitor_Default, Simulation ModelText="C_Capacitor_Default 1 0 1p", Simulation PortMap=(1:1),(2:2)
C4 C8 C40 C50 C52: library part C3216X6S2A106KT0A0E, "10uF X6S ±10% 100V 1206 Ceramic Capacitors RoHS"
  C4: Simulation ModelName=C_Capacitor_Default, Simulation ModelText="C_Capacitor_Default 1 0 1p", Simulation PortMap=(1:1),(2:2)
C5 C13 C15 C20 C21 C34 C36 C37: library part CL21B104KCFNNNE, "100nF ±10% 100V Ceramic Capacitor X7R 0805"
  C5 C21 C36 C37: Simulation ModelName=C_Capacitor_Default, Simulation ModelText="C_Capacitor_Default 1 0 1p", Simulation PortMap=(1:1),(2:2)
C6 C7: library part GRM21BR61A476ME15L_1, "47uF ±20% 10V Ceramic Capacitor X5R 0805", Simulation ModelName=C_Capacitor_Default, Simulation ModelText="C_Capacitor_Default 1 0 1p", Simulation PortMap=(1:1),(2:2)
C9: library part CC0603KRX7R9BB153, "10uF ±10% 10V Ceramic Capacitor X5R 0603"
C10 C11 C12 C17 C18 C19: library part CC0805KRX7R0BB103, "10nF ±10% 100V Ceramic Capacitor X7R 0805"
C14: library part CL10B224KA8NNNC, "220nF ±10% 25V Ceramic Capacitor X7R 0603"
C16 C32 C33 C55 C56: library part CC0603X5R25V225KN, "2.2uF X5R ±10% 25V 0603 Ceramic Capacitors RoHS"
  C55 C56: Simulation ModelName=C_Capacitor_Default, Simulation ModelText="C_Capacitor_Default 1 0 1p", Simulation PortMap=(1:1),(2:2)
C26 C30 C31 C43 C53: library part CL10B105KA8NNNC, "1uF ±10% 25V Ceramic Capacitor X7R 0603"
  C26 C43 C53: Simulation ModelName=C_Capacitor_Default, Simulation ModelText="C_Capacitor_Default 1 0 1p", Simulation PortMap=(1:1),(2:2)
C28 C29: library part CC0603KRX7R9BB102, "1nF ±10% 50V Ceramic Capacitor X7R 0603"
C35: library part CIA0805X5R475K101MT, "4.7uF ±10% 100V Ceramic Capacitor X5R 0805"
C38 C39 C49: library part CGA0805X7R105K101MT, "1uF ±10% 100V Ceramic Capacitor X7R 0805"
C57 C58: library part CL10C180JB8NNNC, "18pF ±5% 50V Ceramic Capacitor C0G 0603", Simulation ModelName=C_Capacitor_Default, Simulation ModelText="C_Capacitor_Default 1 0 1p", Simulation PortMap=(1:1),(2:2)
CN1: library part "HX PH254-01-04-Z-L11.5 STRAIGHT PIN HEADER", "Pin Header 1 2.5mm 6mm -40℃~+105℃ 3mm 4P 2.54mm 3A 1kV 1x4P Through Hole,P=2.54mm Headers, Male Pins RoHS"
D1: library part SS210, "Diode 100V 2A Surface Mount SMA(DO-214AC)"
D2: library part "VISHAY SMCJ54A-E3/57T", "87.1VC Clamp 17.2A Ipp TVS DIODE DO-214AB(SMCJ)", Simulation ModelName=smcj54a, Simulation ModelText=".SUBCKT smcj54a 9 2 / DF 9 90 DFMOD / .MODEL DFMOD D N = 2 IS = 1E-009 RS = 0.0184853 / + EG = 1.11 XTI = 3 / + CJO = 1.606E-009 VJ = 1.68538 M = 0.42 FC = 0.5 / + TT = 1E-008 T_MEASURED = 25 / * Leakage / RL 9 90 RLMOD 5.4E+007  / .MODEL RLMOD RES TC1 = 0 TC2 = 0 T_MEASURED = 25 / * Breakdown / RBD 90 4 1.392 / EBD 4 3 10 20 1 / DBD 3 9 DBDMOD  / .MODEL DBDMOD D IS = 1E-015 N = 0.5 T_MEASURED = 25 T_ABS = 25 / IBVC 0 10 0.001 / RBVC 10 0 RBVCMOD 63150  / .MODEL RBVCMOD RES TC1 = 0 T_MEASURED = 25 / RBDX 20 23 1.392 / DBVC 23 0 DBDMOD  / IBVD 0 20 0.001 / L1 90 2 1E-015 / .ENDS", Simulation PortMap=(1:1),(2:2)
D3: library part BZT52C56, "Zener Diode Independent 56V 500mW Surface Mount SOD-123W"
D4: library part ZMM5V6_C707195, "Zener Diode Independent 5.6V 500mW Surface Mount LL-34"
IC1: library part LMR16030SDDAR, "2.5MHz Buck Adjustable 800mV~50V 3A 4.3V~60V SO-8-EP Voltage Regulators - DC DC Switching Regulators RoHS", Simulation ModelName=LMR16030S_TRANS, Simulation ModelText=".SUBCKT LMR16030S_TRANS BOOT EN FB GND RT/SYNC SS SW VIN PAD PARAMS: SS=0 / R_U100_R339         GND RT/SYNC  500meg   / V_U100_V105         U100_N17467204 0 4.2Vdc / E_U100_ABM54         U100_N17466738 0 VALUE {  / + {IF(V(U100_N17466711)<0.1875,0.125*V(U100_N17466470),   / + (IF(V(U100_N17466711)<0.375,0.25*V(U100_N17466470),   / + (IF(V(U100_N17466711)<0.5625,0.5*V(U100_N17466470),V(U100_N17466470))))))}  / +  } / D_U100_D78         U100_N17475790 U100_N17476944 D_D1  / E_U100_ABM51         U100_N17465902 0 VALUE { / +  if(V(U100_SYNC_DET)>0.5,0,(((-V(I_RT)*1000)   / + **(1/1.088))*90.52748*1u*1.015))   } / V_U100_V106         U100_N17503167 0 1 / X_U100_U725         U100_N17466245 U100_N17467423 U100_N17465899 AND2_BASIC_GEN / +  PARAMS: VDD=1 VSS=0 VTHRESH=500E-3 / X_U100_U183         SDWN U100_N17466875 U100_N17466883 OR2_BASIC_GEN PARAMS: / +  VDD=1 VSS=0 VTHRESH=500E-3 / E_U100_E56         U100_N17466711 0 FB GND 1 / X_U100_S60    U100_RAMP_CNTRL 0 U100_VRAMP 0 Oscillator_RT_SYNC_U100_S60  / X_U100_U600         RAMPIN U100_N17503167 MUXCLK COMP_BASIC_GEN PARAMS: VDD=1 / +  VSS=0 VTHRESH=0.5 / E_U100_E58         U100_N17466245 0 U100_N17475790 0 1 / X_U100_U730         U100_N17466245 U100_N17467414 INV_BASIC_GEN PARAMS: VDD=1 / +  VSS=0 VTHRESH=500E-3 / C_U100_C113         RAMPIN 0  5p IC=0  / G_U100_ABMII15         U100_N17466947 RAMPIN VALUE { V(U100_N17466738)    } / E_U100_ABM52         U100_N17465891 0 VALUE { IF(V(U100_SYNC_DET)>.5,0,1)    } / X_U100_U186         U100_CLK_DET SDWN U100_RAMP_CNTRL OR2_BASIC_GEN PARAMS: / +  VDD=1 VSS=0 VTHRESH=500E-3 / V_U100_V104         U100_N17466947 0 5 / E_U100_ABM59         U100_SYNC_DET 0 VALUE { IF((V(U100_RT_SYNC_CHCK)<0.98 & / +  V(U100_RT_SYNC_CHCK)>1.02),1,0)    } / E_U100_E53         U100_N17466093 0 U100_VRAMP U100_SYNC_FREQ_CHCK 1000000 / I_U100_I17         U100_N17467204 U100_VRAMP DC 1Adc   / R_U100_R343         0 RT/SYNC  500MEG   / V_U100_V103         U100_N17466912 U100_N17467201 0 / E_U100_ABM55         U100_N17476944 0 VALUE { IF(V(U100_SYNC_LVL_CHCK)<0.5,0,1) / +     } / C_U100_C179         0 U100_VRAMP  1u IC=0  / E_U100_ABM53         U100_SYNC_FREQ_OK 0 VALUE { / +  IF((V(U100_SYNC_FREQ_CHCK)>424.78m & V(U100_SYNC_FREQ_CHCK)<3.99),1,0)    } / C_U100_C112         0 U100_SYNC_FREQ_CHCK  1n  TC=0,0  / R_U100_R344         I_RT 0  1   / X_U100_U734         U100_N17467414 U100_N17467423 BUF_DELAY_BASIC_GEN PARAMS: / +  VDD=1 VSS=0 VTHRESH=0.5 DELAY=10n / D_U100_D73         U100_VRAMP U100_N17467204 D_D1  / C_U100_C177         0 U100_SYNC_EN  1n IC=0 TC=0,0  / X_U100_H13    RT/SYNC U100_N17466912 I_RT 0 Oscillator_RT_SYNC_U100_H13  / R_U100_R341         U100_SYNC_FREQ_OK U100_SYNC_EN  1 TC=0,0  / C_U100_C183         0 U100_N17475790  1n  TC=0,0  / D_U100_D77         U100_N17466093 U100_SYNC_FREQ_CHCK D_D2  / E_U100_E57         U100_N17466532 GND U100_N17465891 0 1 / E_U100_E55         U100_RT_SYNC_CHCK 0 RT/SYNC GND 1 / D_U100_D74         RAMPIN U100_N17466947 D_D1  / R_U100_R347         U100_N17476944 U100_N17475790  42 TC=0,0  / X_U100_U724         U100_RT_SYNC_CHCK U100_N17466179 U100_N17466150 / +  U100_SYNC_LVL_CHCK COMPHYS_BASIC_GEN PARAMS: VDD=1 VSS=0 VTHRESH=0.5 / E_U100_ABM56         U100_N17466470 0 VALUE { / +  IF(V(U100_SYNC_EN)>0.5,V(U100_N17467666),V(U100_N17465902))    } / V_U100_V99         U100_N17466150 0 1.198 / E_U100_ABM57         U100_N17467666 0 VALUE { 5p/V(U100_FREQ_TO_TIME)    } / X_U100_U735         MUXCLK U100_N17466875 BUF_DELAY_BASIC_GEN PARAMS: VDD=1 / +  VSS=0 VTHRESH=0.5 DELAY=20n / R_U100_R340         U100_N17467201 U100_N17466532  1   / V_U100_V100         U100_N17466179 0 1.699 / X_U100_S59    U100_N17466883 0 RAMPIN 0 Oscillator_RT_SYNC_U100_S59  / E_U100_ABM58         U100_CLK_DET 0 VALUE { IF(V(U100_N17465899)<0.5,0,1)    } / E_U100_ABM190         U100_FREQ_TO_TIME 0 VALUE { / +  V(U100_SYNC_FREQ_CHCK)*.000001    } / X_U8_S35    U8_BOOT_SW_ON 0 BOOT U8_N16795601 Driver_U8_S35  / D_U8_D14         SW U8_N16770032 D_D1  / X_U8_U616         U8_LDRV ENAB U8_BOOT_ON U8_SDWN_N U8_BOOT_SW_ON / +  AND4_BASIC_GEN PARAMS: VDD=1 VSS=0 VTHRESH=500E-3 / X_U8_U623         U8_N16769726 PWM_FINAL U8_HDRVIN AND2_BASIC_GEN PARAMS: VDD=1 / +  VSS=0 VTHRESH=500E-3 / R_U8_R250         U8_HDRVIN U8_N16829827  14.43   / E_U8_ABM3         U8_N168201641 0 VALUE { ((V(U8_OUT) *-100m)+ 3.3)    } / X_U8_U606         SDWN U8_SDWN_N INV_BASIC_GEN PARAMS: VDD=1 VSS=0 / +  VTHRESH=500E-3 / X_U8_S31    HDRV SW U8_N16770032 SW Driver_U8_S31  / C_U8_C144         0 U8_N16829827  1n   / X_U8_U6         U8_N16820133 U8_N16820119 U8_OUT COMP_BASIC_GEN PARAMS: VDD=1 / +  VSS=0 VTHRESH=0.5 / X_U8_U617         U8_LDRV U8_N16771112 U8_N16825880 AND2_BASIC_GEN PARAMS: / +  VDD=1 VSS=0 VTHRESH=500E-3 / X_U8_U624         U8_HDRVIN U8_N16829827 U8_N16826034 AND2_BASIC_GEN PARAMS: / +  VDD=1 VSS=0 VTHRESH=500E-3 / R_U8_R4         U8_N168201641 U8_N16820119  1   / E_U8_ABM168         U8_N16820158 0 VALUE { {IF((V(BOOT) - V(SW)) < 3.2,0,1)}    / +  } / X_U8_U603         U8_OUT U8_BOOT_ON INV_BASIC_GEN PARAMS: VDD=1 VSS=0 / +  VTHRESH=500E-3 / X_U8_U625         SDWN U8_N16769726 INV_BASIC_GEN PARAMS: VDD=1 VSS=0 / +  VTHRESH=500E-3 / X_U8_S37    U8_BOOT_SW_ON 0 U8_N16797590 GND Driver_U8_S37  / R_U8_R247         U8_N16820158 BOOT_UVLO  1   / R_U8_R248         U8_N16826034 U8_N16826193  1 TC=0,0  / C_U8_C142         0 U8_N16826193  1.443n  TC=0,0  / C_U8_C4         0 U8_N16820119  1n   / R_U8_R251         U8_LDRV U8_N16771112  14.43   / C_U8_C141         0 BOOT_UVLO  1n   / X_U8_S5    U8_N16826193 0 BOOT HDRV Driver_U8_S5  / D_U8_D16         SW U8_N16797590 D_D3  / E_U8_ABM170         U8_N16820133 0 VALUE { V(BOOT) - V(SW)    } / C_U8_C145         0 U8_N16771112  1n   / R_U8_R246         GND BOOT  10MEG   / C_U8_C143         0 U8_N16771034  1.443n  TC=0,0  / D_U8_D15         VIN U8_N16795601 D_D1  / X_U8_H2    VIN U8_N16770032 ISW 0 Driver_U8_H2  / R_U8_R249         U8_N16825880 U8_N16771034  1 TC=0,0  / X_U8_S4    U8_N16771034 0 HDRV SW Driver_U8_S4  / X_U8_U621         U8_HDRVIN U8_LDRV INV_BASIC_GEN PARAMS: VDD=1 VSS=0 / +  VTHRESH=500E-3 / V_U11_V67         U11_N16734547 GND 1.2 / X_U11_U604         ENAB U11_N16734487 INV_BASIC_GEN PARAMS: VDD=1 VSS=0 / +  VTHRESH=500E-3 / X_U11_U605         U11_N16734651 UVLO INV_BASIC_GEN PARAMS: VDD=1 VSS=0 / +  VTHRESH=500E-3 / V_U11_V65         U11_N167343550 0 0.285 / I_U11_I1         0 EN DC 1u   / X_U11_U615         VIN U11_N16734493 U11_N167343550 U11_N16734651 / +  COMPHYS_BASIC_GEN PARAMS: VDD=1 VSS=0 VTHRESH=0.5 / R_U11_R288         EN 0  10MEG   / V_U11_V64         U11_N16734493 GND 4.2 / X_U11_U616         EN U11_N16734547 ENAB COMP_BASIC_GEN PARAMS: VDD=1 VSS=0 / +  VTHRESH=0.5 / X_U11_U601         U11_N16734487 UVLO SDWN OR2_BASIC_GEN PARAMS: VDD=1 VSS=0 / +  VTHRESH=500E-3 / G_U11_ABMII1         0 EN VALUE { if(V(ENAB)>0.5,3.6u,0)    } / X_U7_U620         U7_N16489522 U7_N16489700 d_d PARAMS: / X_U7_U823         U7_N16497188 PWM_CLK U7_N16489522 AND2_BASIC_GEN PARAMS: / +  VDD=1 VSS=0 VTHRESH=500E-3 / X_U7_U824         U7_N16489522 U7_N16489700 PWM_CLK PWM_FINAL OR3_BASIC_GEN / +  PARAMS: VDD=1 VSS=0 VTHRESH=500E-3 / R_U7_R272         U7_N16489522 U7_N16489700  75   / X_U7_U822         PWM_CLK U7_N16497188 INV_DELAY_BASIC_GEN PARAMS: VDD=1 VSS=0 / +  VTHRESH=0.5 DELAY=15n / C_U7_C172         0 U7_N16489700  1.443n   / R_U5_R12         U5_N16790193 COMP  360k   / C_U5_C5         0 COMP  50f   / R_U5_R4         0 COMP  250Meg   / E_U5_E9         U5_N16790376 0 FB GND 1 / C_U5_C10         0 U5_N16790193  60p   / E_U5_ABM8         U5_N16790300 0 VALUE { {IF(V(COMP) > 2.2,1,0)}    } / X_U5_U615         SS_INT U5_N16790318 SS2GM / C_U5_C9         0 OL  1n   / X_U5_U614         U5_N16790300 U5_N16790265 U5_N16790290 AND2_BASIC_GEN PARAMS: / +  VDD=1 VSS=0 VTHRESH=500E-3 / G_U5_ABM2I1         0 COMP VALUE { {LIMIT((V(VREF) - V(U5_N16790376))*V(U5_GM), / +  -3u,3u)}    } / X_U5_U603         SDWN U5_N16790265 INV_BASIC_GEN PARAMS: VDD=1 VSS=0 / +  VTHRESH=500E-3 / V_U5_V5         U5_N16790259 0 0.39 / R_U5_R11         U5_N16790290 OL  1   / C_U5_C166         0 U5_GM  1n   / X_U5_S5    UVLO 0 COMP 0 ErrorAmp_U5_S5  / D_U5_D15         U5_N16790259 COMP D_D2  / R_U5_R290         U5_N16790318 U5_GM  1   / V_U5_V6         U5_N16790256 0 2.85 / D_U5_D16         COMP U5_N16790256 D_D2  / D_U4_D77         GND SS D_D2  / R_U4_R15         U4_N167408121 U4_N16740842  1   / G_U4_ABMII2         SS GND VALUE { {IF(V(U4_N16740842) > 0.5,400u,0)}    } / E_U4_ABM178         VREF 0 VALUE { IF(V(SS_INT) < 0.75, V(SS_INT),0.75)    } / C_U4_C15         0 U4_N16740842  1n   / D_U4_D64         SS U4_N16740968 D_D1  / X_U4_U1         SDWN U4_N16741042 INV_BASIC_GEN PARAMS: VDD=1 VSS=0 / +  VTHRESH=500E-3 / V_U4_V71         U4_N16740968 GND 1.2Vdc / V_U4_V70         U4_N16741142 GND 2.85 / E_U4_E1         SS_INT 0 SS GND 1 / G_U4_ABMII1         U4_N16741142 SS VALUE { {IF(V(U4_N16741042) > 0.5,3u,0)}    / +  } / D_U4_D62         SS U4_N16741142 D_D1  / E_U4_ABM181         U4_N167408121 0 VALUE { {IF(V(SDWN) > 0.5 | (V(OL) > 0.5 ), / +  1,0)}    } / X_U6_U600         U6_ICTRL U6_ISWF U6_COM_PULSE COMP_BASIC_GEN PARAMS: VDD=1 / +  VSS=0 VTHRESH=0.5 / E_U6_ABM166         U6_N16795665 0 VALUE { {((V(COMP) /260k)  - 1.5u)*(17/6)}   / +   } / E_U6_ABM151         U6_N16796154 0 VALUE { {IF(V(PWM_FINAL) > 0.5, 1,0)}    } / D_U6_D58         U6_N16796158 U6_N16796154 D_D1  / E_U6_ABM149         U6_VRAMP 0 VALUE { V(RAMPIN)*0.0049897m    } / X_U6_U616         U6_N16796183 U6_N16799371 U6_N168023163 U6_OVTP / +  COMPHYS_BASIC_GEN PARAMS: VDD=1 VSS=0 VTHRESH=0.5 / E_U6_ABM152         U6_ISWF 0 VALUE { {IF(V(U6_N16796158) > 0.5,   / + V(ISW),0)}   } / E_U6_ABM168         U6_N16796216 0 VALUE { LIMIT(((V(U6_N16795665) - / +  V(U6_VRAMP)) * 10)   / + ,6.369863u,99.749545u)   } / V_U6_V80         U6_N16795752 0 0.41 / E_U6_E9         U6_N16799371 0 FB GND 1 / V_U6_V79         U6_N16796183 0 .8025 / X_U6_U602         U6_COM_PULSE BOOT_UVLO U6_OVTP U6_N16795766 AND3_BASIC_GEN / +  PARAMS: VDD=1 VSS=0 VTHRESH=500E-3 / C_U6_C136         0 U6_ICTRL  1n   / X_U6_U615         COMP U6_N16795752 U6_N16795706 U6_N16795759 COMPHYS_BASIC_GEN / +  PARAMS: VDD=1 VSS=0 VTHRESH=0.5 / R_U6_R240         U6_N16818592 U6_ICTRL  1   / X_U6_U625         U6_N16817255 U6_N16817360 INV_BASIC_GEN PARAMS: VDD=1 VSS=0 / +  VTHRESH=500E-3 / R_U6_R255         U6_N16796154 U6_N16796158  14.4k   / X_U6_U605         U6_N16795766 U6_N16795759 U6_N16817255 AND2_BASIC_GEN PARAMS: / +  VDD=1 VSS=0 VTHRESH=500E-3 / V_U6_V81         U6_N16795706 0 0.01 / V_U6_V82         U6_N168023163 0 15m / E_U6_ABM208         U6_N16818592 0 VALUE { (V(U6_N16796216) * 47.096774k)    } / C_U6_C146         0 U6_N16796158  5p   / X_U6_U15         MUXCLK U6_N16817360 PWM_CLK N16817937 SRLATCHRHP_BASIC_GEN / +  PARAMS: VDD=1 VSS=0 VTHRESH=0.5 / .IC         V(SS )={{SS}*2.85} / .ENDS LMR16030S_TRANS", Simulation PortMap=(1:1),(2:8),(3:2),(4:5),(5:3),(6:6),(7:4),(8:7),(9:9)
IC2: library part SPX3819M5-L-3-3, "3.3V 16V Positive Fixed SOT-23-5 Voltage Regulators - Linear, Low Drop Out (LDO) Regulators RoHS", Simulation ModelName=SPX3819, Simulation ModelText=".SUBCKT SPX3819 VIN VOUT GND EN /  / * PARAMETERS / .PARAM VREF=3.3 / .PARAM VDROP=0.34 / .PARAM ILIM=0.9 / .PARAM ROUT=0.05 /  / * Enable logic (EN > 1V) / EEN VEN 0 VALUE = { V(EN) > 1 } /  / * Regulator core (with dropout) / EREG VREG 0 VALUE = { V(VEN)*LIMIT(V(VIN)-VDROP, 0, VREF) } /  / * Output resistance / Rout VREG VOUT {ROUT} /  / * Current sense / Rsense VOUT VSENSE 0.01 /  / * Current limit clamp / GCLAMP VOUT 0 VALUE = {  /     IF(I(Rsense) > ILIM, -(I(Rsense)-ILIM)*5, 0) / } /  / * Ground reference / RGND GND 0 1m /  / .ENDS SPX3819", Simulation PortMap=(1:1),(2:3),(3:4),(4:NC),(5:2)
IC3: library part DRV8301DCA, "MOSFET 1.7A 2.3A HTSSOP-56-EP-6mm Motor Drivers, Controllers RoHS", Simulation ModelName=DRV8301, Simulation ModelText=".subckt DRV8301 AGND AVDD VINM VINP VOUT / XI0 AGND AVDD VINM VINP VOUT PD DALLASAMP_HT4 / VPD AVDD PD 0 / .ends DRV8301", Simulation PortMap=(1:NC),(2:NC),(3:NC),(4:NC),(5:NC),(6:NC),(7:NC),(8:NC),(9:NC),(10:NC),(11:NC),(12:NC),(13:NC),(14:NC),(15:NC),(16:NC),(17:NC),(18:NC),(19:NC),(20:NC),(21:NC),(22:NC),(23:NC),(24:NC),(25:5),(26:NC),(27:2),(28:1),(29:NC),(30:NC),(31:NC),(32:4),(33:3),(34:NC),(35:NC),(36:NC),(37:NC),(38:NC),(39:NC),(40:NC),(41:NC),(42:NC),(43:NC),(44:NC),(45:NC),(46:NC),(47:NC),(48:NC),(49:NC),(50:NC),(51:NC),(52:NC),(53:NC),(54:NC),(55:NC),(56:NC),(57:NC)
J7 J8 J9 J10 J11: library part 2way, ComponentLink1Description=Source, ComponentLink1URL=http://www.edatools.cz/addons, FootprintNote="LP=12mil, MP=40mil, HP=120mil"
L1 L2: library part FNR5040S470MT, "1.15A 47uH ±20% 1.2A 354mΩ Magnetic Shielded Inductor SMD,5x5mm Fixed Inductors RoHS"
L3: library part BLM21PG221SN1D, "220Ω@100MHz 1 Line Ferrite Bead 0805 2A 45mΩ", Simulation ModelName=FB_220_ADV, Simulation ModelText=".SUBCKT FB_220_ADV 1 2 /  / Rdc 1 2 0.045 /  / * low freq inductive / L1 1 3 50n / R1 3 2 1 /  / * high freq loss / R2 1 2 200 / Cpar 1 2 2p /  / .ends FB_220_ADV", Simulation PortMap=(1:1),(2:2)
Q1 Q2 Q3 Q4 Q5 Q6: library part TPH4R008NH,L1Q(M, "N-Channel 80V 100A 78W SOP-8-Advance", Simulation ModelName=TPH4R008QM_G0_00, Simulation ModelText=".SUBCKT TPH4R008QM_G0_00 1 2 3 / M0 1 22 3 3 smsmosfet / + L=1e-06 / + W=4 / + AD=4E-006 / + AS=4E-006 / + PD=8 / + PS=8 / D0 3 1 DDS1 / D1 3 1 DDS2 / D2 2 10 DGS1 / D3 3 10 DGS2 / R2 10 2 1E+009 / R3 10 3 1E+009 / RG 2 22 1.6 / .MODEL smsmosfet NMOS / + LEVEL=7 / + MOBMOD=1 / + CAPMOD=3 / + NOIMOD=1 / + TOX=2.5e-08 / + XJ=1.5E-007 / + NCH=1.7E+017 / + NGATE=0 / + RSH=0 / + TNOM=25 / + VTH0=3.725 / + VOFF=-0.18 / + NFACTOR=2.6 / + U0=2800 / + K1=0.5 / + K2=0 / + K3=80 / + K3B=0 / + W0=2.5E-006 / + NLX=1.74E-007 / + DVT0=2.2 / + DVT1=0.53 / + DVT2=-0.032 / + DVT0W=0 / + DVT1W=5.3E+006 / + DVT2W=-0.032 / + DWG=0 / + DWB=0 / + UA=9.0124e-09 / + UB=5.87E-019 / + UC=-4.65E-011 / + VSAT=27710.317 / + A0=6.1022 / + AGS=1.6111 / + B0=0 / + B1=0 / + KETA=-0.047 / + A1=0 / + A2=1 / + DELTA=0.066202 / + RDSW=9100 / + PRWG=0 / + PRWB=0 / + WR=1 / + CDSC=2.4E-004 / + CDSCD=0 / + CDSCB=0 / + CIT=0 / + ETA0=0.08 / + ETAB=-0.07 / + DSUB=0.56 / + PCLM=1e-05 / + PDIBLC1=0.10461 / + PDIBLC2=0.0028736 / + PDIBLCB=0 / + DROUT=0.56 / + PSCBE1=4.24E+008 / + PSCBE2=1E-009 / + PVAG=0 / + ALPHA0=0 / + ALPHA1=0 / + BETA0=30 / + NJ=1 / + JS=2e-07 / + XPART=0 / + CGSO=4.8e-10 / + CGDO=9e-12 / + CGBO=0 / + CGDL=9e-10 / + CGSL=2e-10 / + CKAPPA=0.185 / + CF=0 / + CLC=1E-007 / + CLE=0.6 / + VOFFCV=0 / + NOFF=1 / + DLC=0 / + ACDE=1 / + MOIN=15 / + CJ=0 / + CJSW=1E-012 / + CJSWG=1E-012 / + PB=1 / + PBSW=1 / + PBSWG=1 / + MJ=0.5 / + MJSW=0.33 / + MJSWG=0.33 / + AF=1 / + EF=1 / + KF=0 / + UTE=-1.4 / + KT1=-1.2 / + KT1L=0 / + KT2=0.022 / + UA1=4.31E-009 / + UB1=-7.61E-018 / + UC1=-5.6E-011 / + AT=3.3E+004 / + PRT=20000 / + XTI=3 / + TCJ=0 / + TPB=0 / + TCJSW=0 / + TPBSW=0 / + TCJSWG=0 / + TPBSWG=0 / + DWC=1.09 / .MODEL DDS1 D / + TNOM=25 / + IS=9.9997e-10 / + RS=0.0010306 / + N=1.3377 / + CJO=2e-09 / + VJ=0.9 / + M=0.33 / + XTI=0 / + TT=3.45e-08 / + BV=80 / + IBV=0.01 / .MODEL DDS2 D / + TNOM=25 / + IS=9.9997e-10 / + RS=0.0010306 / + N=1.3377 / + CJO=1E-15 / + VJ=0.7 / + M=0.3 / + XTI=0 / + TT=3.45e-08 / .MODEL DGS1 D / + TNOM=25 / + IS=1E-015 / .MODEL DGS2 D / + TNOM=25 / + IS=1E-015 / .ENDS"
  Q1 Q3 Q4 Q5 Q6: Simulation PortMap=(1:3),(2:3),(3:3),(4:2),(5:1),(6:1),(7:1),(8:1),(9:1)
  Q2: Simulation PortMap=(1:3),(2:3),(3:3),(4:2),(5:3),(6:1),(7:1),(8:1),(9:1)
Q9: library part MMBT3904TT1G, "Bipolar (BJT) Transistor NPN 40V 200mA 300MHz 200mW Surface Mount SOT-416", Simulation ModelName=MMBT3904, Simulation ModelText=".subckt MMBT3904 C  B  E  params: Vceo=40 Vcbo=60 Vebo=6 Ic=200m hfe=300 Ices=100n Vbe=700m ft=300Meg Ccbo=4p Cebo=8p Rc=1 Rb=.1 Re=.1 Eg=1.11 Xti=3 /  / * Above values are an example for the ***MMBT3904***. Using the / * above symbol file allows for direct insertion of other values / * according to these data sheet parameters: / * / * Vceo    	Collector Emitter voltage, Base open / * Vcbo		Collector Base voltage, Emitter open / * Vebo    	Emitter Base voltage, Collector open / * Ic		DC Collector current / * hfe		Max DC current gain / * Ices		Collector Emitter cut-off current / * Vbe		Min Base Emitter voltage / * ft		Gain bandwidth product / * Ccbo		Typ. Collector Base capacitance / * Cebo		Typ. Emitter Base capacitance / * Rc/Rb/Re	Fixed values / * / * Activation energy: Eg=1.11 for Si (npn) transistor / * Sat.-current temp. exp: Xti=3 for Si (npn) transistor /  / Q  C B E  Transistor /  / .model Transistor NPN(Is={Ices/2} Bf={hfe} Bvcbo={Vcbo} Bvbe={-Vebo} Vceo={Vceo} Vje={Vbe} Tf={1/(2*pi*ft)} Eg={Eg} Xti={Xti} Icrating={Ic} Cjc={Ccbo*2} Cje={Cebo*2} Rc={Rc} Rb={Rb} Re={Re} mfg=Diotec) /  / .ends", Simulation PortMap=(1:2),(2:3),(3:1)
R1 R2 R3 R16 R17 R18: library part CRCW080510R0FKEAHP, "10Ω 500mW Thick Film Resistor ±100ppm/℃ ±1% 0805 Chip Resistor - Surface Mount RoHS"
R4 R26: library part RC0603FR-07100KL, "100mW 100kΩ 75V Thick Film Resistor ±100ppm/℃ ±1% 0603 Chip Resistor - Surface Mount RoHS"
  R4: Simulation ModelName=R_Resistor_Default, Simulation ModelText="R_Resistor_Default 1 0 1K", Simulation PortMap=(1:1),(2:2)
R5 R6 R7 R13 R14 R15: library part FRC1206F8R06TS, "8.06Ω ±1% 250mW 1206 Thick Film Resistor"
R8: library part RC0603FR-0749K9L, "100mW 49.9kΩ 75V Thick Film Resistor ±100ppm/℃ ±1% 0603 Chip Resistor - Surface Mount RoHS", Simulation ModelName=R_Resistor_Default, Simulation ModelText="R_Resistor_Default 1 0 1K", Simulation PortMap=(1:1),(2:2)
R9 R10 R19 R27 R28 R31 R32 R34: library part RC0603FR-0710KL, "100mW 10kΩ 75V ±100ppm/℃ Thick Film Resistor ±1% 0603 Chip Resistor - Surface Mount ROHS"
  R19 R27 R28 R31 R32 R34: Simulation ModelName=R_Resistor_Default, Simulation ModelText="R_Resistor_Default 1 0 1K", Simulation PortMap=(1:1),(2:2)
R11: library part 0603WAF1782T5E, "17.8kΩ ±1% 100mW 0603 Thick Film Resistor", Simulation ModelName=R_Resistor_Default, Simulation ModelText="R_Resistor_Default 1 0 1K", Simulation PortMap=(1:1),(2:2)
R12: library part FRC0603F2492TS, "24.9kΩ ±1% 100mW 0603 Thick Film Resistor"
R20 R21: library part WSLP25123L300FEA, "3.3mΩ 3W Current Sense Resistor ±1% ±150ppm/℃ 2512 Chip Resistor - Surface Mount RoHS"
R22 R23: library part FRC0603F56R0TS, "56Ω ±1% 100mW 0603 Thick Film Resistor"
R29: library part RC0603FR-0712KL, "12kΩ 100mW 75V Thick Film Resistor ±100ppm/℃ ±1% 0603 Chip Resistor - Surface Mount RoHS"
R30: library part RC0603FR-071ML, "100mW 1MΩ 75V Thick Film Resistor ±100ppm/℃ ±1% 0603 Chip Resistor - Surface Mount RoHS", Simulation ModelName=R_Resistor_Default, Simulation ModelText="R_Resistor_Default 1 0 1K", Simulation PortMap=(1:1),(2:2)
R33: library part RC0603FR-0733KL, "100mW 33kΩ 75V Thick Film Resistor ±100ppm/℃ ±1% 0603 Chip Resistor - Surface Mount RoHS", Simulation ModelName=R_Resistor_Default, Simulation ModelText="R_Resistor_Default 1 0 1K", Simulation PortMap=(1:1),(2:2)
SW1: "12V 2.5mm Round Button 3mm SPST 50mA SMD,3x2.5mm Tactile Switches ROHS"
U1: library part STM32F405RGT6, "ARM Cortex-M4 32 Bit 168MHz 51 LQFP-64(10x10) Microcontrollers RoHS"
X1: library part ABM3B-8.000MHZ-10-1-U-T, "Crystal 8MHz ±10ppm 10pF 200Ω SMD5032-4P"

## Free pads (board coordinates)
  rrect50% 5.5x4.5 smd far side: 1(56.435,31.007) 1(56.468,18.391) 1(56.499,7.11)

## Via types
v1: diameter 0.7, hole 0.4, L1-SIGNAL/PWR to L4-SIGNAL/PWR, tented both sides, 336 vias
v2: diameter 0.45, hole 0.3, L1-SIGNAL/PWR to L4-SIGNAL/PWR, tented both sides, 118 vias
v3: diameter 1.1, hole 0.6, L1-SIGNAL/PWR to L4-SIGNAL/PWR, tented both sides, 5 vias
v4: diameter 1.1, hole 0.7, L1-SIGNAL/PWR to L4-SIGNAL/PWR, tented both sides, 3 vias
v5: diameter 0.7, hole 0.3, L1-SIGNAL/PWR to L4-SIGNAL/PWR, tented both sides, 1 vias

## Nets (pads, with @x,y where several pads share a name; then routed paths per layer and width w, separated by ;. In a path a pad name is that pad's centre, name@x,y a point inside that pad or via, vN(x,y) a via of type N, cw(c..) or ccw(c..) an arc to the next point about the centre after c; other vN are vias at no path point)
A3V3: C23.2 C24.2 C53.2 C54.2 IC2.5 IC3.24 L3.1 R33.2 U1.13 | length 72.1
  L1-SIGNAL/PWR w0.25: U1.13@8.722,5.25 9.55,5.25 ; IC3.24@26.134,12.72 27.18,12.72
  L1-SIGNAL/PWR w0.35: 9.55,5.25 9.725,5.25 9.75,5.225 ; 27.18,12.72 27.42,12.72
  L1-SIGNAL/PWR w0.45: 9.75,5.225 10.275,5.225 v2(10.4,5.1) ; v1(26.9,7) 28.6,7 29.3,7.7 29.3,11.6 28.18,12.72 27.42,12.72 ; v2(36.7,7.8) 36.7,9.1 39.247,11.647 R33.2@39.8,11.647
  L1-SIGNAL/PWR w0.5: v1(7.5,18) 7.4,18.1 7.4,20.2 8,20.8 10.2,20.8 ; L3.1@9.2,19.5 9.2,19.8 10.2,20.8 ; C24.2@10.8,23.4 10.75,23.35 C23.2@10.75,21.89 ; IC2.5@12.276,21.498 11.141,21.498 C23.2@10.75,21.89 ; v1(12.75,7.65) 13.6,8.5 v2(15.5,8.5) ; 10.2,20.8 10.75,21.35 C23.2@10.75,21.89
  L4-SIGNAL/PWR w0.45: v2(15.5,8.5) 17,7 v1(26.9,7) 27,7.1 30.625,7.1 31.325,7.8 v2(36.7,7.8)
  L4-SIGNAL/PWR w0.5: v1(7.5,18) 8.541,16.959 8.541,11.859 11.1,9.3 v1(12.75,7.65) 13.1,7.3 13.1,5.4 12.8,5.1 C54.2@10.273,5.1
AH: IC3.17 U1.41 | length 14.3
  L1-SIGNAL/PWR w0.2: U1.41@20.098,7.75 22.377,7.75 22.823,8.196 v2(22.857,8.196) ; v2(23.3,16.325) 23.405,16.22 IC3.17@26.134,16.22
  L4-SIGNAL/PWR w0.2: v2(22.857,8.196) 23.242,8.581 23.242,9.293 23.45,9.501 23.45,11.234 23.242,11.442 23.242,16.267 v2(23.3,16.325)
AL: IC3.18 U1.34 | length 21.3
  L1-SIGNAL/PWR w0.2: U1.34@20.098,4.25 21.75,4.25 24.8,7.3 24.8,7.886 24.882,7.886 24.882,7.95 v2@24.89,7.95 ; IC3.18@26.134,15.72 v2(27.28,15.72)
  L4-SIGNAL/PWR w0.2: v2(24.89,7.95) 29.05,7.95 30.01,8.91 30.01,12.99 v2(27.28,15.72)
BH: IC3.19 U1.42 | length 14
  L1-SIGNAL/PWR w0.2: U1.42@20.098,8.25 20.795,8.25 20.799,8.246 21.234,8.246 21.238,8.25 21.329,8.25 21.7,8.621 21.7,9 v2(21.625,9) ; v2(22.6,15.8) 23.058,15.8 24.5,15.8 25.08,15.22 IC3.19@26.134,15.22
  L4-SIGNAL/PWR w0.2: v2(21.625,9) 21.987,9.362 22.499,9.362 22.746,9.362 23.05,9.666 23.05,11.069 22.6,11.519 v2(22.6,15.8)
BL: IC3.20 U1.35 | length 19.3
  L1-SIGNAL/PWR w0.2: U1.35@20.098,4.75 21.45,4.75 24.2,7.5 24.2,7.993 v2(24.241,7.993) ; IC3.20@26.134,14.72 27.28,14.72 v2(27.3,14.7)
  L4-SIGNAL/PWR w0.2: v2(24.241,7.993) 24.365,7.993 24.365,8.167 24.672,8.475 28.775,8.475 29.59,9.29 29.59,12.41 v2(27.3,14.7)
CH: IC3.21 U1.43 | length 13
  L1-SIGNAL/PWR w0.2: U1.43@20.098,8.75 20.109,8.761 21.006,8.761 v2(21.017,8.771) ; v2(21.6,15.2) 21.631,15.231 22.169,15.231 24.487,15.231 24.663,15.055 24.663,14.637 25.08,14.22 25.498,14.22 IC3.21@26.134,14.22
  L4-SIGNAL/PWR w0.2: v2(21.017,8.771) 21.064,8.819 21.064,9.182 21.79,9.908 21.79,12.247 21.525,12.512 21.525,15.125 v2(21.6,15.2)
CL: IC3.22 U1.36 | length 14.6
  L1-SIGNAL/PWR w0.2: U1.36@20.098,5.25 21.15,5.25 23.6,7.7 v2(23.6,8.1) ; IC3.22@26.134,13.72 26.98,13.72 27.084,13.616 v2(27.161,13.693)
  L4-SIGNAL/PWR w0.2: v2(23.6,8.1) 23.642,8.142 23.642,9.127 23.85,9.335 23.85,11.4 23.642,11.608 23.642,12.45 24.936,13.745 25.457,13.745 27.109,13.745 v2(27.161,13.693)
DC_CAL: IC3.12 U1.11 | length 25
  L1-SIGNAL/PWR w0.2: U1.11@8.722,6.25 9.95,6.25 14.4,10.7 18.312,10.7 19.312,11.7 19.312,14.532 20.98,16.2 21.7,16.2 v2(21.7,16.195) ; v2(21.9,17.7) 22.2,18 24.442,18 25.147,18.704 26.119,18.704 IC3.12@26.134,18.72
  L4-SIGNAL/PWR w0.2: v2(21.7,16.195) 21.7,17.5 v2(21.9,17.7)
en: IC1.3 R26.1 R29.2 | length 3.6
  L1-SIGNAL/PWR w0.5: R29.2@19.349,27.825 R26.1@19.349,29.305 19.614,29.57 IC1.3@21.359,29.57
EN_GATE: IC3.16 U1.10 | length 23.4
  L1-SIGNAL/PWR w0.2: U1.10@8.722,6.75 9.772,6.75 14.122,11.1 18.1,11.1 18.912,11.912 18.912,14.761 21.151,17 24.2,17 24.48,16.72 IC3.16@26.134,16.72
GH_A: IC3.47 R5.1 | length 14
  L1-SIGNAL/PWR w0.2: IC3.47@33.549,19.72 32.811,19.72 32.786,19.745 32.655,19.745 32.3,20.1 32.3,25 v2(34.275,26.975)
  L4-SIGNAL/PWR w0.2: v2(34.275,26.975) 34.275,27.275 34.876,27.876 R5.1@38.651,27.876
GH_B: IC3.42 R6.1 | length 11.1
  L1-SIGNAL/PWR w0.2: IC3.42@33.549,17.22 34.62,17.22 35.2,17.8 v2(35.2,17.82) ; v2(39.8,15.6) 40.4,16.2 v2(40.4,16.9)
  L4-SIGNAL/PWR w0.2: v2(35.2,17.82) 36.28,18.9 38.1,18.9 40.052,16.948 40.352,16.948 v2(40.4,16.9) ; R6.1@38.721,15.5 39.7,15.5 v2(39.8,15.6)
GH_C: IC3.37 R7.1 | length 21.6
  L1-SIGNAL/PWR w0.2: IC3.37@33.549,14.72 33.534,14.704 32.585,14.704 32.385,14.504 31.831,14.504 29.9,12.573 29.9,4.7 30.6,4 37.5,4 v2(37.7,3.8)
  L4-SIGNAL/PWR w0.2: v2(37.7,3.8) 37.971,3.8 38.046,3.875 R7.1@38.521,3.4
GL_A: IC3.45 R13.1 | length 26.7
  L1-SIGNAL/PWR w0.2: IC3.45@33.549,18.72 33.565,18.735 34.404,18.735 34.83,19.16 v2(34.83,19.172) ; v2(38.305,20.887) 38.282,20.91 38.282,21.412 38.282,33.482 40.49,35.69 43.105,35.69 44.1,34.694 44.1,34.566 R13.1@44.101,33.381
  L4-SIGNAL/PWR w0.2: v2(34.83,19.172) 36.545,20.887 v2(38.305,20.887)
GL_B: IC3.40 R14.1 | length 14
  L1-SIGNAL/PWR w0.2: IC3.40@33.549,16.22 35.262,16.22 35.644,16.22 v2(35.744,16.32) ; v2(38.096,17.596) 38.096,19.886 38.722,20.513 40.247,20.513 40.672,20.938 R14.1@44.189,20.938
  L4-SIGNAL/PWR w0.2: v2(35.744,16.32) 37.049,17.625 37.571,17.625 38.067,17.625 v2(38.096,17.596)
GL_C: IC3.35 R15.1 | length 17.5